# Altium PCB Digital Clock.PcbDoc (part 1 of 3)
Units mm, origin at the board's own origin, x right, y up, seen from the top; angles counter-clockwise.
Board outline 75 x 75 mm, 4 copper layers (Top Layer, GROUND, POWER, Bottom Layer), stack 1.369 mm thick; 74 components, 63 nets, 278 pads, 114 vias.
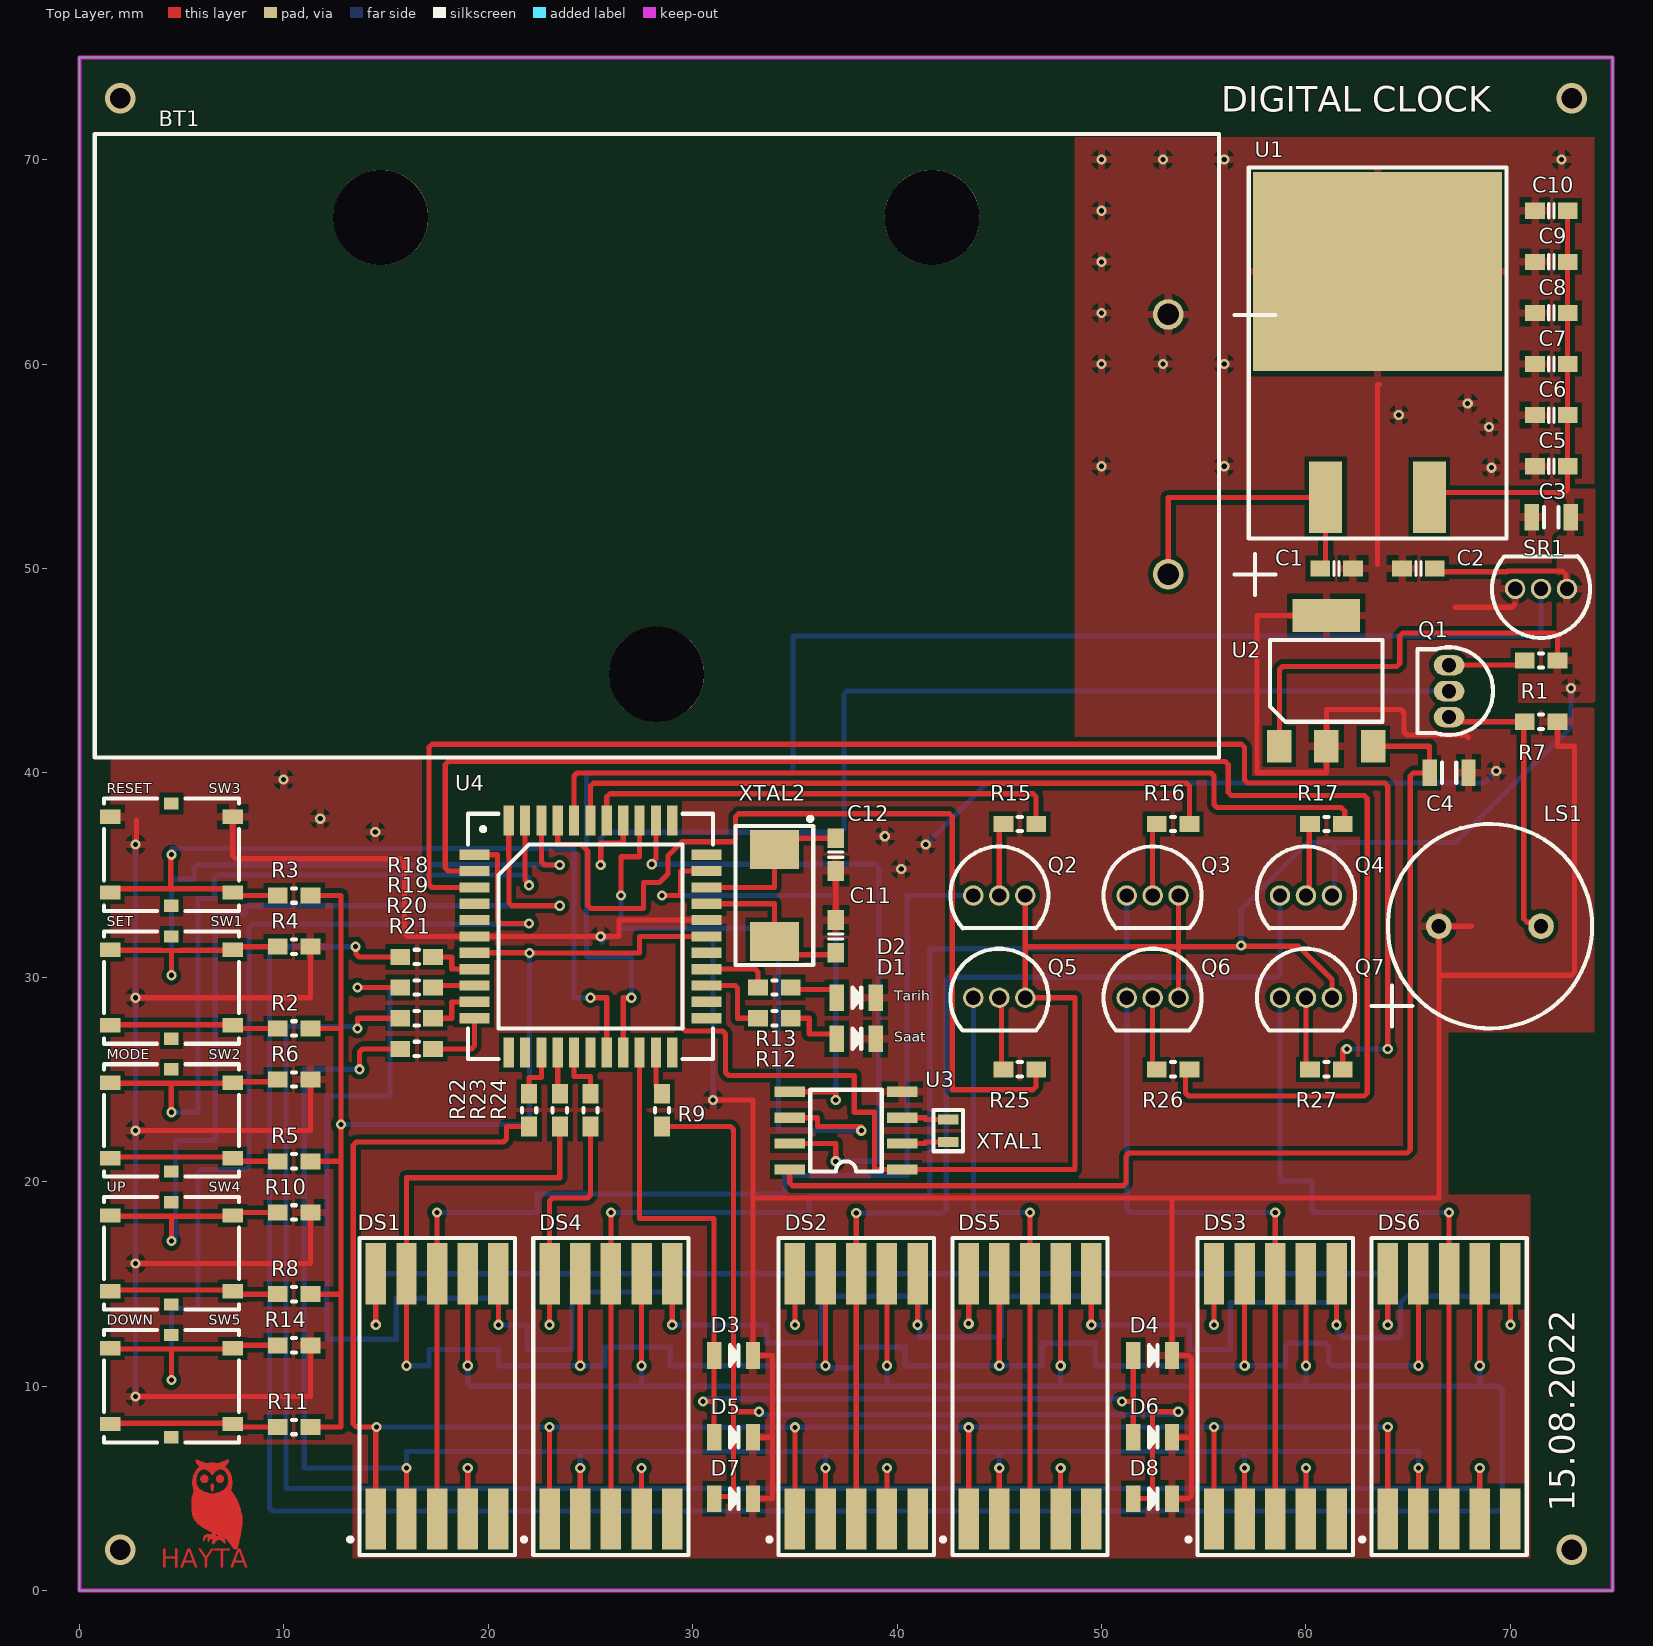
[diagram p0: Top Layer view]
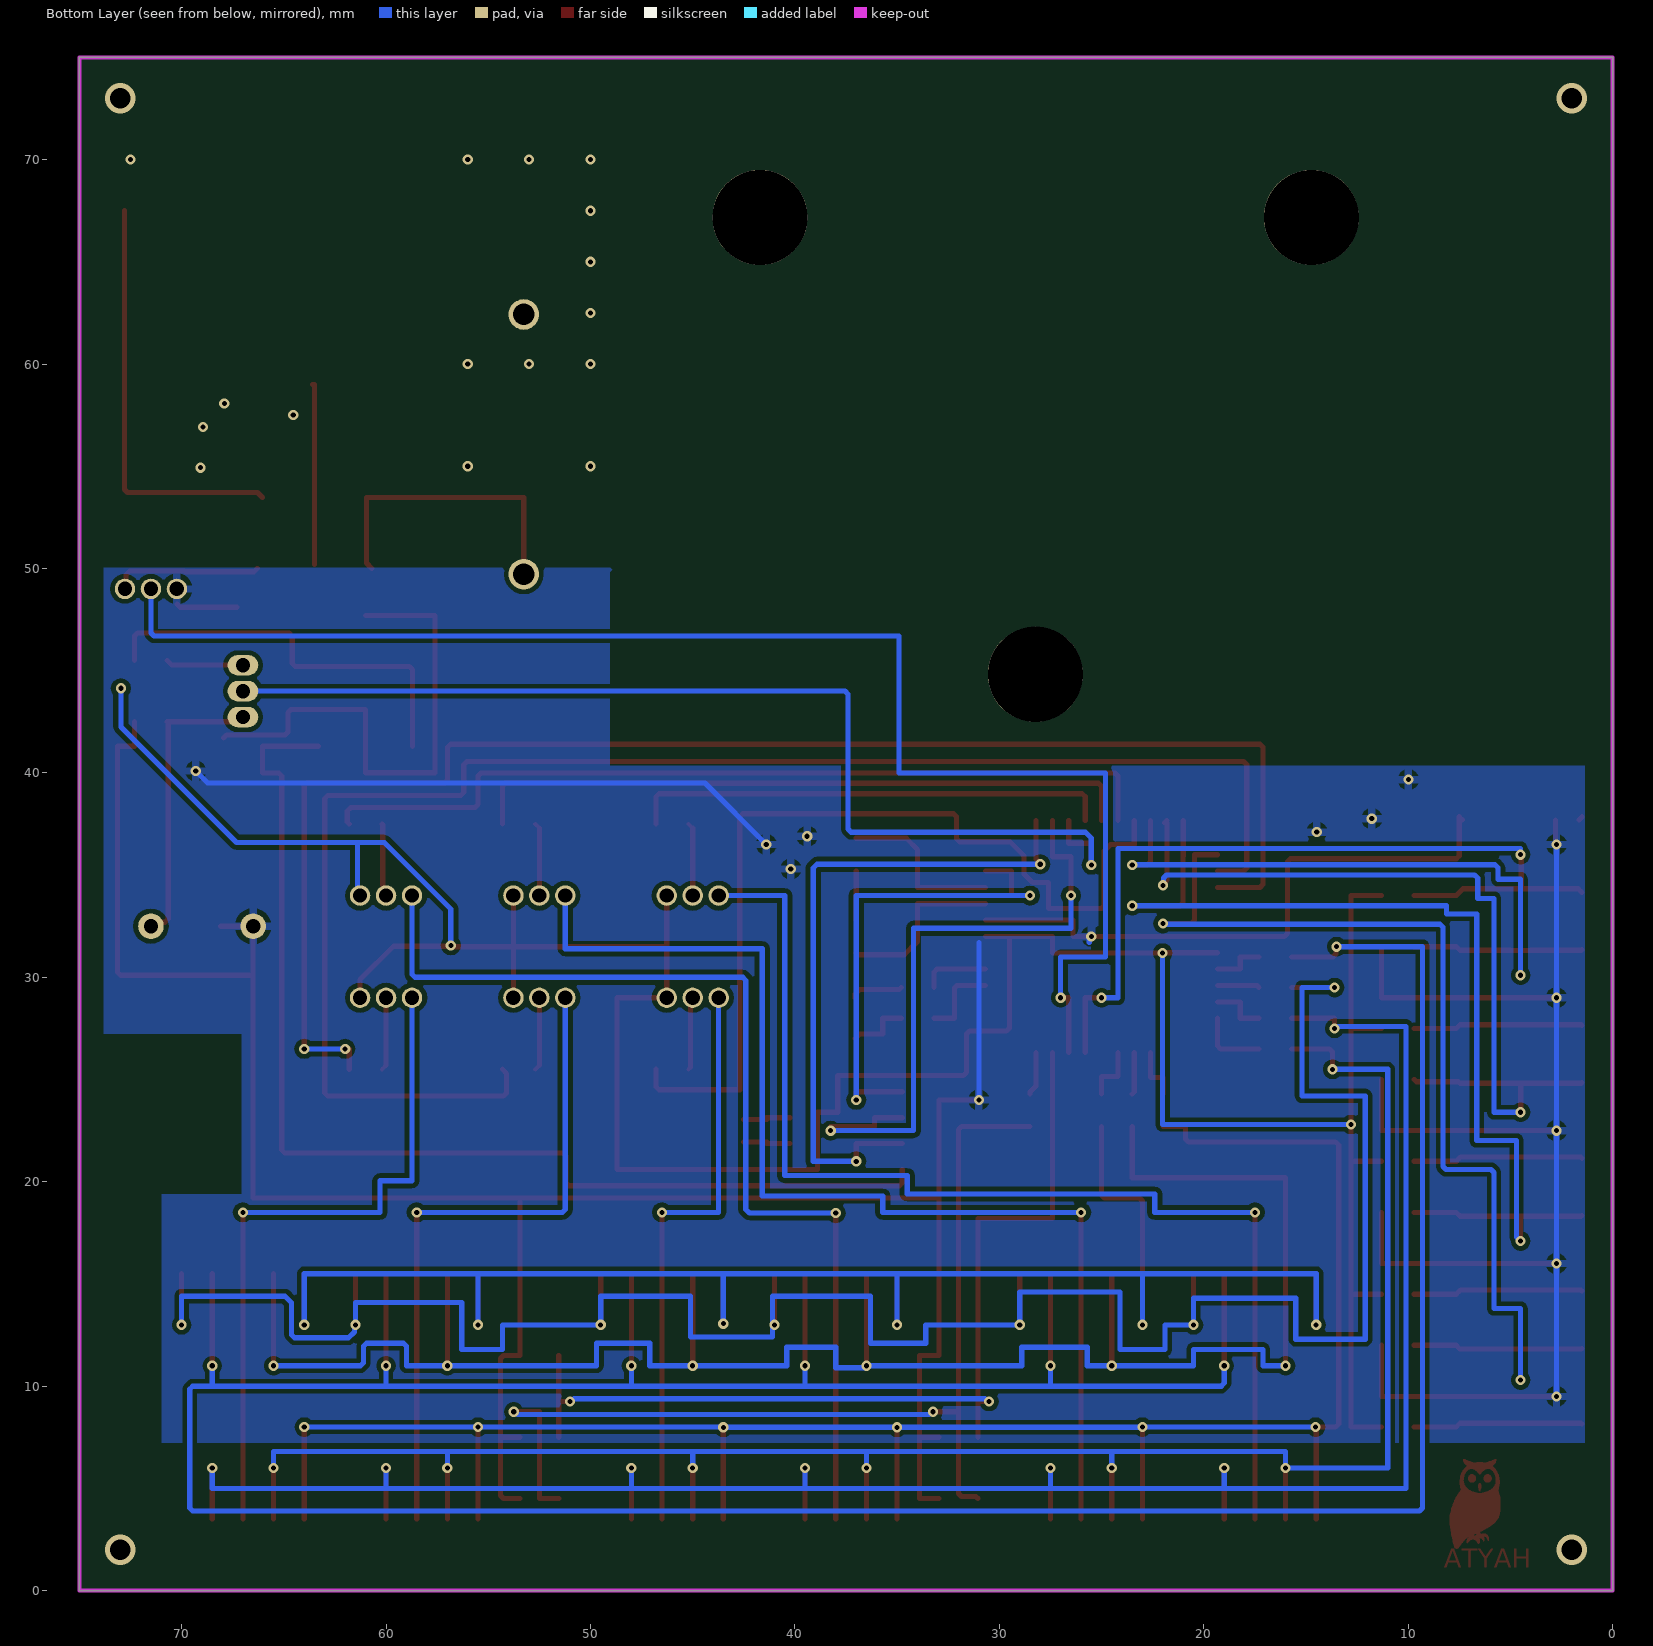
[diagram p1: Bottom Layer view, seen from below]
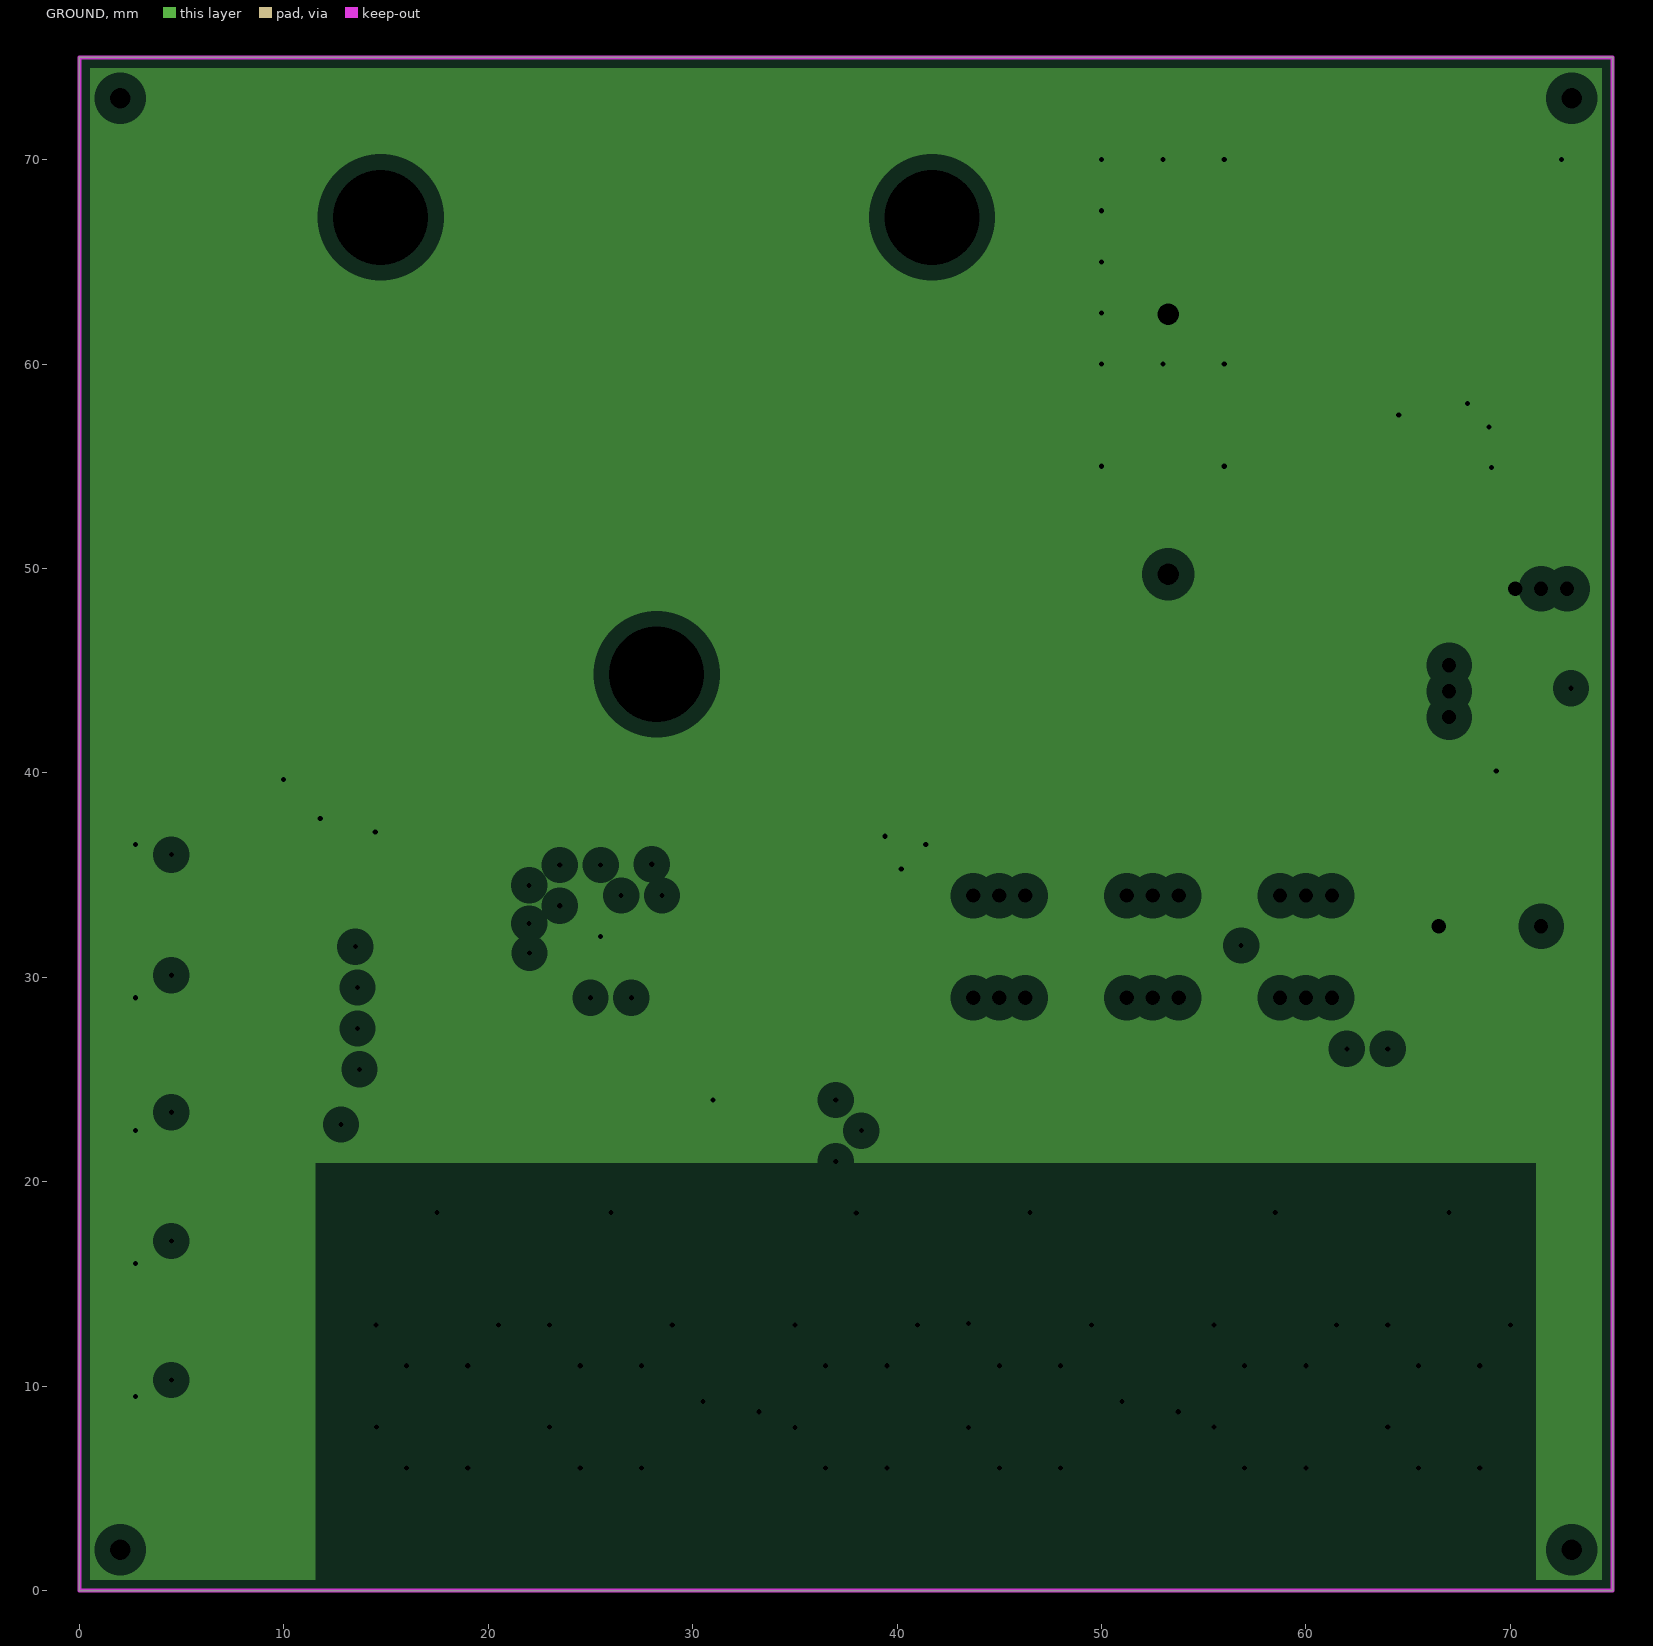
[diagram p2: GROUND, clearances drawn from the general rule]
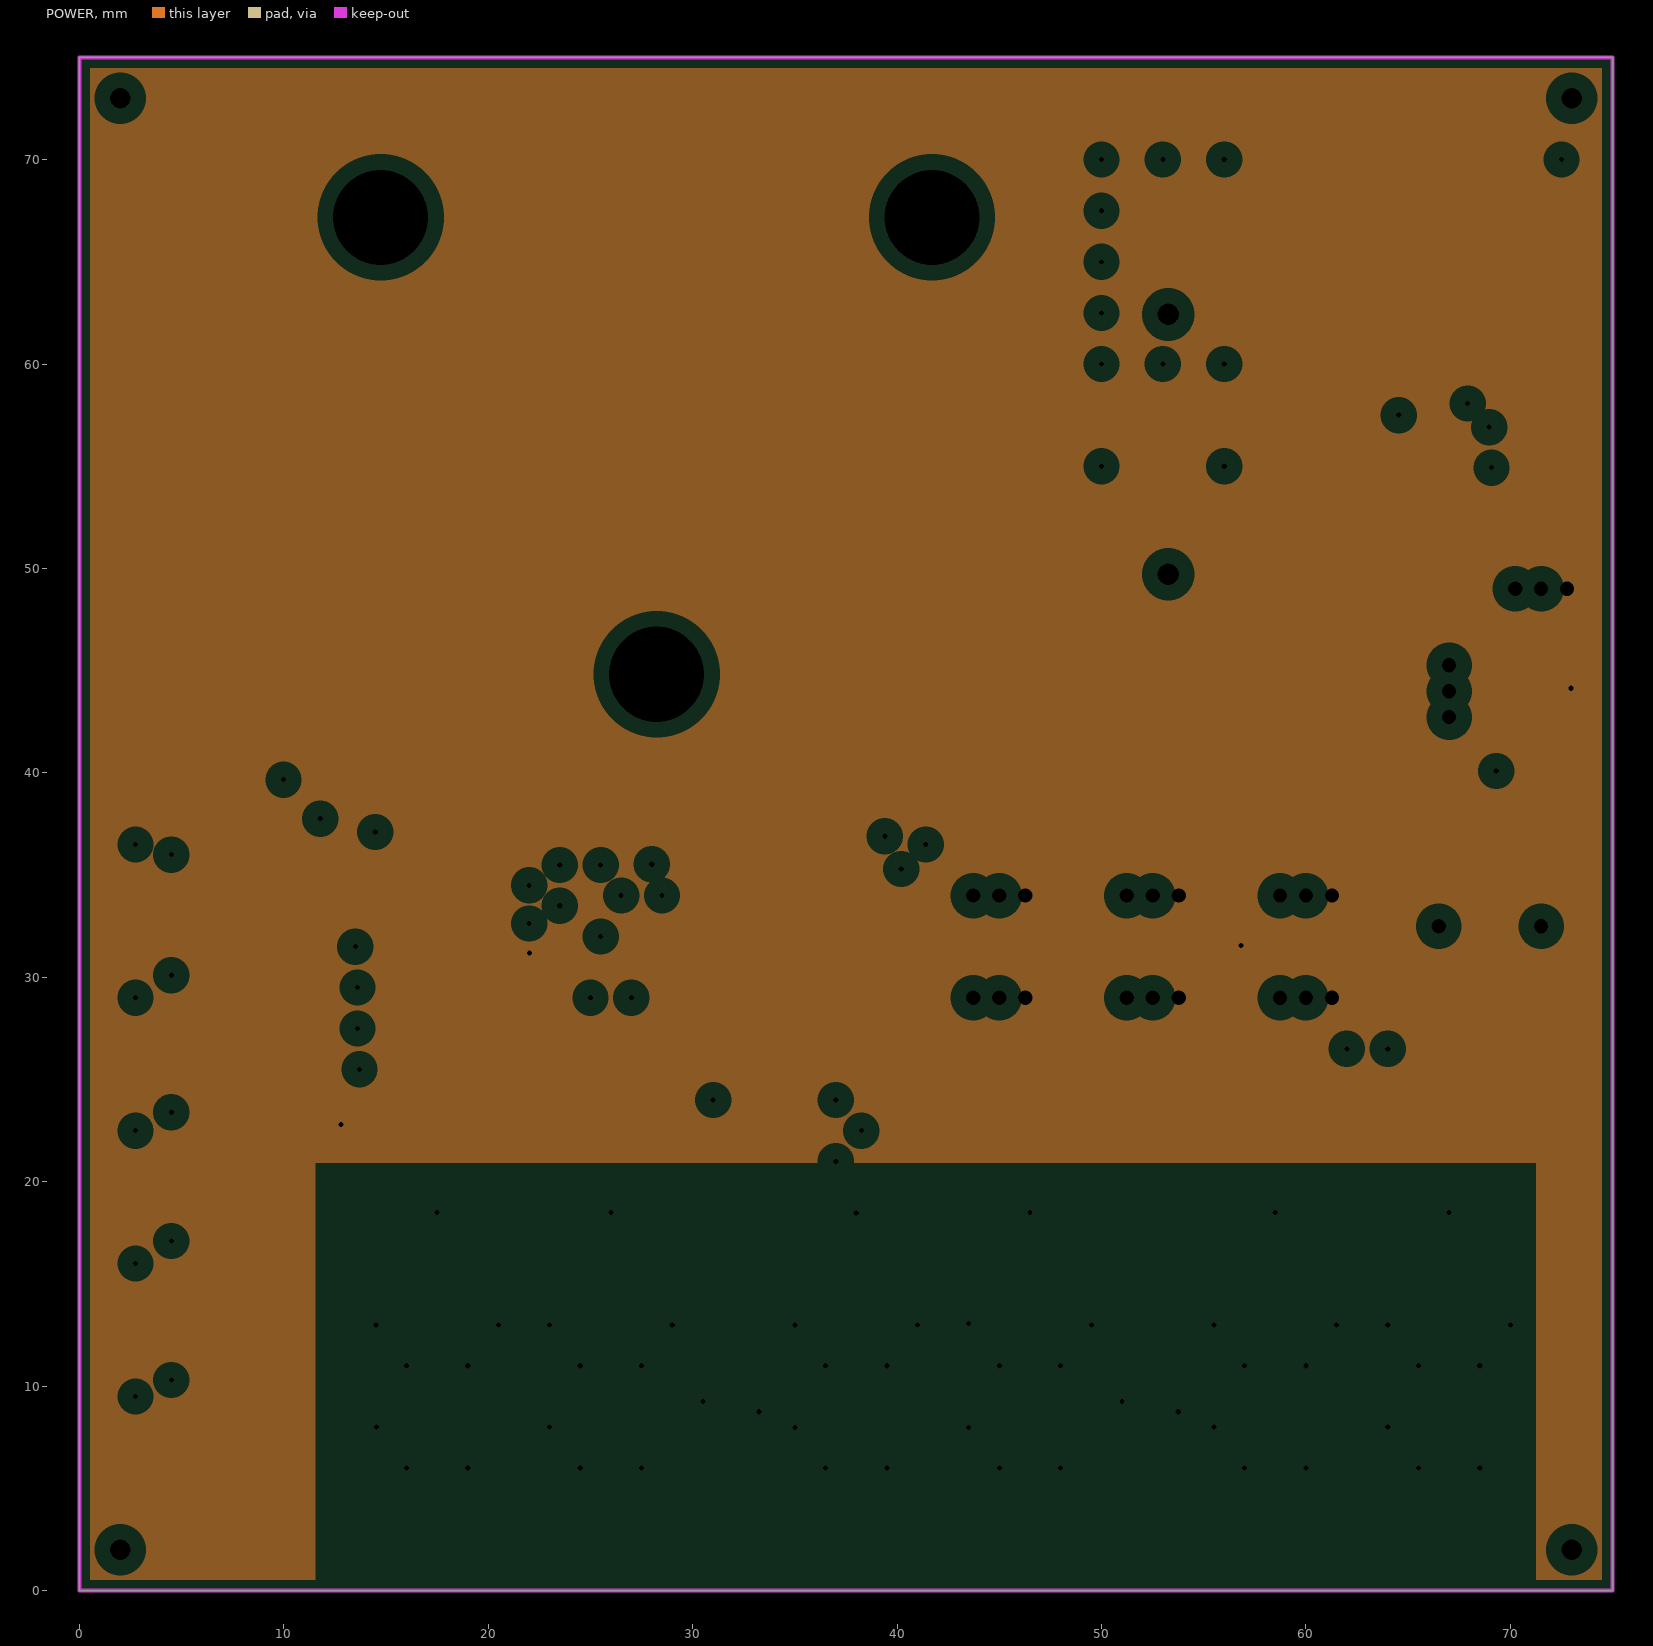
[diagram p3: POWER, clearances drawn from the general rule]
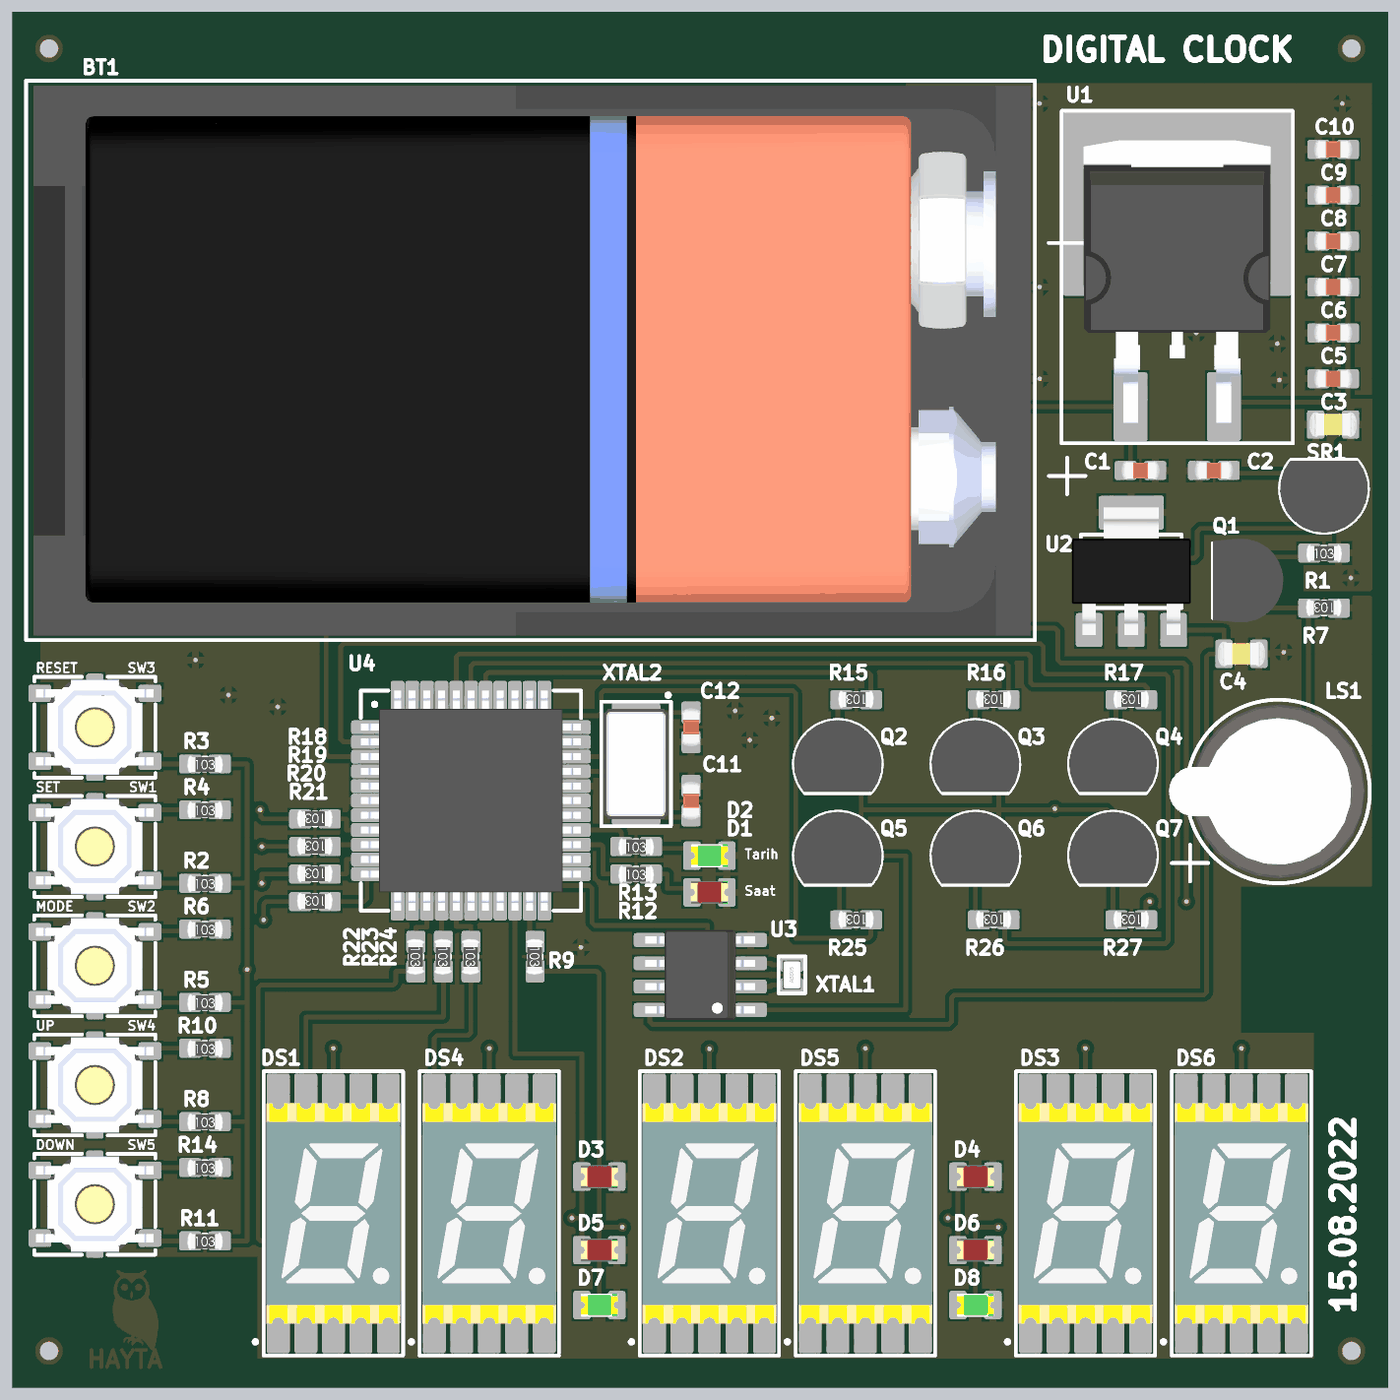
[diagram p5: 3D render of the assembled board from above, using the file's embedded part models]

## Layer stack, top to bottom
Top Solder: solder mask 0.0254, SM-001, Dk 4
Top Layer: signal copper 0.035
Dielectric 1: prepreg 0.1295, PP-017, Dk 4.3
Dielectric 2: prepreg 0.1295, PP-017, Dk 4.3
GROUND: plane copper 0.035, net GND
Dielectric 3: core 0.7112, Core-039, Dk 4.8
POWER: plane copper 0.035, net 5V
Dielectric 4: prepreg 0.1295, PP-017, Dk 4.3
Dielectric 5: prepreg 0.1295, PP-017, Dk 4.3
Bottom Layer: signal copper 0.035
Bottom Solder: solder mask 0.0254, SM-001, Dk 4

## Board outline
0,0 0,75 75,75 75,0

## Design rules (kind name [scope] priority, off if disabled: settings)
Clearance [All] p1: gap=0.229 ignorepadtopadclearanceinfootprint=TRUE except(0: Arc-Text Track-Text SMDPad-Text THPad-Text Via-Text Fill-Text Poly-Text Region-Text Text-Text Text-Hole; 0.203: SMDPad-SMDPad SMDPad-THPad THPad-THPad; 0.254: Arc-Arc Arc-Track Arc-SMDPad Arc-THPad Arc-Via Track-Track Track-SMDPad Track-THPad Track-Via SMDPad-Via THPad-Via Via-Via)
ComponentClearance [All] p1: gap=0.127 collisioncheckmode=3 verticalgap=0 showdistances=FALSE
HoleSize [All] p1: absolutevalues=TRUE maxlimit=5 minlimit=0.051 maxpercent=80.000 minpercent=20.000
MinimumSolderMaskSliver [All] p1: minsoldermaskwidth=0.05
NetAntennae [All] p1: netantennaetolerance=0.254
PasteMaskExpansion [All] p1: expansion=0.127
PlaneClearance [All] p1: clearance=0.762
PlaneConnect [All] p1: planeconnectstyle=Direct reliefexpansion=0.381 reliefentries=2 reliefconductorwidth=0.381 reliefairgap=0.254
PolygonConnect [All] p1: connectstyle=Relief reliefconductorwidth=0.381 reliefentries=4 polygonreliefangle="90 Angle" airgapwidth=0.254
RoutingCorners [All] p1: cornerstyle=45-Degree minsetback=1.905 maxsetback=1.905
RoutingVias [All] p1: holewidth=0.3 width=0.5 viastyle="Through Hole" minholewidth=0.25 minwidth=0.4 maxholewidth=0.5 maxwidth=1
SMDToCorner [All] p1: distance=10000
SilkToSilkClearance [All] p1: silktosilkclearance=0
SilkToSolderMaskClearance [IsPad] p1: minsilkscreentomaskgap=0 clearancetoexposedcopper=TRUE
SolderMaskExpansion [All] p1: expansion=0.01 istentingtop=FALSE
UnRoutedNet [All] p1: checkbadconnections=TRUE
Width [All] p1: maxlimit=2 minlimit=0.01 preferedwidth=0.5 bottomlayer_minwidth=0.203 bottomlayer_maxwidth=1.778 bottomlayer_prefwidth=0.381 minimp=50.000000 maximp=50.000000 favimp=50.000000
19 further rules are at their usual default settings.

## Components (designator, comment, footprint, x,y, rotation, side; value= is the part's Value field where it differs from the comment)
BT1 "BH9VPC & 6LF22XWA/B" BATTERY_9V 34,56 r0 top value=9V
C1 "GRM033R60J334ME90D" CAP_0603 61.5,50 r180 top
C2 "GRM033R60J104KE19D" CAP_0603 65.5,50 r0 top
C3 "CL21B105KBFNNNE" CAP_0805 72,52.5 r0 top
C4 "CL21A475KAQNNNE" CAP_0805 67,40 r180 top
C5 "GRM033R60J334ME90D" CAP_0603 72,55 r0 top
C6 "GRM033R60J104KE19D" CAP_0603 72,57.5 r0 top
C7 "C0603C104K5RACTU" CAP_0603 72,60 r0 top
C8 "C0603C104K5RACTU" CAP_0603 72,62.5 r0 top
C9 "C0603C104K5RACTU" CAP_0603 72,65 r0 top
C10 "C0603C104K5RACTU" CAP_0603 72,67.5 r0 top
C11 "GRM0335C1H220JA01D" CAP_0603 37,32 r270 top
C12 "GRM0335C1H220JA01D" CAP_0603 37,36 r90 top
D1 "LTST-C170KRKT" "LED RED_0805" 38,27 r0 top
D2 "LTST-C171GKT" "LED GREEN_0805" 38,29 r0 top
D3 "LTST-C170KRKT" "LED RED_0805" 32,11.5 r0 top
D4 "LTST-C170KRKT" "LED RED_0805" 52.5,11.5 r0 top
D5 "LTST-C170KRKT" "LED RED_0805" 32,7.5 r0 top
D6 "LTST-C170KRKT" "LED RED_0805" 52.5,7.5 r0 top
D7 "LTST-C171GKT" "LED GREEN_0805" 32,4.5 r0 top
D8 "LTST-C171GKT" "LED GREEN_0805" 52.5,4.5 r0 top
DS1 "ACSA03-41SURKWA-F01" "7 SEG_CA_SMD_ACSX03-41" 17.5,9.5 r0 top value=7SEG_A
DS2 "ACSA03-41SURKWA-F01" "7 SEG_CA_SMD_ACSX03-41" 38,9.5 r0 top value=7SEG_A
DS3 "ACSA03-41SURKWA-F01" "7 SEG_CA_SMD_ACSX03-41" 58.5,9.5 r0 top value=7SEG_A
DS4 "ACSA03-41SURKWA-F01" "7 SEG_CA_SMD_ACSX03-41" 26,9.5 r0 top value=7SEG_A
DS5 "ACSA03-41SURKWA-F01" "7 SEG_CA_SMD_ACSX03-41" 46.5,9.5 r0 top value=7SEG_A
DS6 "ACSA03-41SURKWA-F01" "7 SEG_CA_SMD_ACSX03-41" 67,9.5 r0 top value=7SEG_A
LS1 "AI-1027-TWT-5V-R" BUZZER_5V 69,32.5 r90 top value=BUZZER
Q1 "BC237G" TO-92 67,44 r270 top value=BC237
Q2 "BC557BTA" TO-92-3 45,34 r0 top value=BC557
Q3 "BC557BTA" TO-92-3 52.5,34 r0 top value=BC557
Q4 "BC557BTA" TO-92-3 60,34 r0 top value=BC557
Q5 "BC557BTA" TO-92-3 45,29 r0 top value=BC557
Q6 "BC557BTA" TO-92-3 52.5,29 r0 top value=BC557
Q7 "BC557BTA" TO-92-3 60,29 r0 top value=BC557
R1 "RC0603JR-07100RL" RES_0603 71.5,45.5 r0 top
R2 "RC0603JR-07100RL" RES_0603 10.5,27.5 r0 top
R3 "RC0603FR-0710KL" RES_0603 10.5,34 r0 top
R4 "RC0603FR-0710KL" RES_0603 10.5,31.5 r0 top
R5 "RC0603JR-07100RL" RES_0603 10.5,21 r0 top
R6 "RC0603FR-0710KL" RES_0603 10.5,25 r0 top
R7 "RC0603FR-0710KL" RES_0603 71.5,42.5 r180 top
R8 "RC0603JR-07100RL" RES_0603 10.5,14.5 r0 top
R9 "RC0603JR-07100RL" RES_0603 28.5,23.5 r270 top
R10 "RC0603FR-0710KL" RES_0603 10.5,18.5 r0 top
R11 "RC0603JR-07100RL" RES_0603 10.5,8 r0 top
R12 "RC0603JR-07100RL" RES_0603 34,28 r0 top
R13 "RC0603JR-07100RL" RES_0603 34,29.5 r0 top
R14 "RC0603FR-0710KL" RES_0603 10.5,12 r0 top
R15 "RC0603FR-071KL" RES_0603 46,37.5 r180 top
R16 "RC0603FR-071KL" RES_0603 53.5,37.5 r180 top
R17 "RC0603FR-071KL" RES_0603 61,37.5 r180 top
R18 "RC0603JR-07330RL" RES_0603 16.5,31 r180 top
R19 "RC0603JR-07330RL" RES_0603 16.5,29.5 r180 top
R20 "RC0603JR-07330RL" RES_0603 16.5,28 r180 top
R21 "RC0603JR-07330RL" RES_0603 16.5,26.5 r180 top
R22 "RC0603JR-07330RL" RES_0603 22,23.5 r270 top
R23 "RC0603JR-07330RL" RES_0603 23.5,23.5 r270 top
R24 "RC0603JR-07330RL" RES_0603 25,23.5 r270 top
R25 "RC0603FR-071KL" RES_0603 46,25.5 r180 top
R26 "RC0603FR-071KL" RES_0603 53.5,25.5 r180 top
R27 "RC0603FR-071KL" RES_0603 61,25.5 r180 top
SR1 "LM35DZ/NOPB" TO-92-3 71.5,49 r180 top value=LM35
SW1 "PTS526 SMG15 SMTR2 LFS" BUTTON_SMD_PTS526-SMG15 4.5,29.5 r0 top value=BUTTON
SW2 "PTS526 SMG15 SMTR2 LFS" BUTTON_SMD_PTS526-SMG15 4.5,23 r0 top value=BUTTON
SW3 "PTS526 SMG15 SMTR2 LFS" BUTTON_SMD_PTS526-SMG15 4.5,36 r0 top value=BUTTON
SW4 "PTS526 SMG15 SMTR2 LFS" BUTTON_SMD_PTS526-SMG15 4.5,16.5 r0 top value=BUTTON
SW5 "PTS526 SMG15 SMTR2 LFS" BUTTON_SMD_PTS526-SMG15 4.5,10 r0 top value=BUTTON
U1 "L7805ACD2T-TR" 7805_D2PAK_CD2T 63.5,59 r90 top value=7805
U2 "AP7361-33E-13" SOT-223 61,44.5 r0 top value=AP7361
U3 "DS1302Z+T&R" SOIC-8 37.5,22.5 r90 top value=DS1302
U4 "PIC16F877-20/PT" TQFP-44 25,32 r0 top value=PIC16F877/A
XTAL1 "ABS05-32.768KHZ-T" ABS05 42.5,22.5 r90 top
XTAL2 "ECS-200-20-23A-EN-TR" "CRYSTAL_2 SMD" 34,34 r270 top

## Footprints (in the part's own frame and the unit in brackets; to place one, negate y for a bottom-side part, rotate by r counter-clockwise, add the part's x,y. Pads: shape width x height; smd on the part's side, far side on the other; paste and mask are expansions set on the pad)
"7 SEG_CA_SMD_ACSX03-41" [mm]
  rect 1x3 smd mask+0.1: A(1.5,6) B(3,6) C(1.5,-6) D(-1.5,-6) DP(3,-6) E(-3,-6) F(-1.5,6) G(-3,6) VCC(0,-6) VCC(0,6)
  silkscreen extent -4.35,-7.75 3.8,7.75, body extent -3.65,-6 3.65,6, height 3.8
7805_D2PAK_CD2T [mm]
  rect 3.5x1.6 smd mask+0.1: 1(-5.525,2.54) 3(-5.525,-2.54)
  rect 9.75x12.2 smd mask+0.1: 2(5.525,0)
  silkscreen extent -7.52,-6.31 10.61,6.3, body extent -6.44,-5.1 8.99,5.1, height 4.6
ABS05 [mm]
  rect 0.5x1 smd: 1(-0.55,0) 2(0.55,0)
  silkscreen extent -1.01,-0.73 1.01,0.73, body extent -0.8,-0.5 0.8,0.5, height 0.5
BATTERY_9V [mm]
  round 1.5 hole 1.05 mask+0.1: 1(19.26,-6.275) 2(19.26,6.425)
  round 4.65 hole 4.65 mask+0.1: ""(-19.26,11.175) ""(-5.76,-11.175) ""(7.71,11.175)
  silkscreen extent -33.25,-15.25 24.5,15.25, body extent -32.85,-15 21.51,14.97, height 20.6
BUTTON_SMD_PTS526-SMG15 [mm]
  rect 1x0.7 smd: 1(-3,1.85) 1(3,1.85) 2(-3,-1.85) 2(3,-1.85)
  rect 0.7x0.6 smd: G(0,-2.5) G(0,2.5)
  silkscreen extent -3.3,-2.75 3.3,2.75, body extent -3.2,-2.6 3.2,2.6, height 1.7
BUZZER_5V [mm]
  round 1.25 hole 0.7: 1(0,2.5) 2(0,-2.5)
  silkscreen extent -5,-5 5,5.8, body extent -4.75,-4.75 4.75,5.95, height 5.05
CAP_0603 [mm]
  rect 0.965x0.787 smd: 1(-0.8,0) 2(0.8,0)
  silkscreen extent -0.13,-0.35 0.13,0.35, body extent -1.05,-0.51 1.05,0.51, height 0.8
CAP_0805 [mm]
  rect 0.7x1.3 smd: 1(-0.95,0) 2(0.95,0)
  silkscreen extent -0.35,-0.5 0.35,0.5, body extent -1.3,-0.68 1.3,0.68, height 0.9
"CRYSTAL_2 SMD" [mm]
  rect 1.9x2.4 smd mask+0.1: 1(-2.25,0) 2(2.25,0)
  silkscreen extent -3.85,-1.9 3.4,1.9, body extent -3,-1.75 3,1.75, height 1.1
"LED GREEN_0805" [mm]
  rect 0.7x1.3 smd mask+0.05: 1(-0.95,0) 2(0.95,0)
  silkscreen extent -0.18,-0.5 0.25,0.5, body extent -1.01,-0.63 1.01,0.62, height 1.1
"LED RED_0805" [mm]
  rect 0.7x1.3 smd mask+0.05: 1(-0.95,0) 2(0.95,0)
  silkscreen extent -0.18,-0.5 0.25,0.5, body extent -1.01,-0.63 1.01,0.62, height 1.1
RES_0603 [mm]
  rect 0.965x0.787 smd: 1(-0.8,0) 2(0.8,0)
  silkscreen extent -0.1,-0.35 0.1,0.35, body extent -0.98,-0.51 1,0.47, height 0.44
SOIC-8 [mm]
  rect 0.5x1.5 smd mask+0.05: 1(-1.905,-2.75) 2(-0.635,-2.75) 3(0.635,-2.75) 4(1.905,-2.75) 5(1.905,2.75) 6(0.635,2.75) 7(-0.635,2.75) 8(-1.905,2.75)
  silkscreen extent -2,-1.75 2,1.75, body extent -2.45,-3 2.45,3, height 1.75
SOT-223 [mm]
  rect 1.2x1.6 smd mask+0.05: 1(-2.3,-3.2) 2(0,-3.2) 3(2.3,-3.2)
  rect 3.3x1.6 smd mask+0.05: 2(0,3.2)
  silkscreen extent -2.75,-2 2.75,2, body extent -3.25,-3.48 3.25,3.48, height 1.65
TO-92 [mm]
  oval 1x1.5 hole 0.7 mask+0.1: 1(-1.27,0) 2(0,0) 3(1.27,0)
  silkscreen extent -2.15,-1.55 2.15,2.15, body extent -2.28,-1.55 2.28,2.29, height 5.19
TO-92-3 [mm]
  round 1 hole 0.7: 1(-1.27,0) 2(0,0) 3(1.27,0)
  silkscreen extent -2.4,-1.6 2.4,2.4, body extent -2.4,-1.53 2.4,2.4, height 5.74
TQFP-44 [mm]
  rect 1.47x0.5 smd: 1(-5.67,4) 2(-5.67,3.2) 3(-5.67,2.4) 4(-5.67,1.6) 5(-5.67,0.8) 6(-5.67,0) 7(-5.67,-0.8) 8(-5.67,-1.6) 9(-5.67,-2.4) 10(-5.67,-3.2) 11(-5.67,-4) 23(5.67,-4) 24(5.67,-3.2) 25(5.67,-2.4) 26(5.67,-1.6) 27(5.67,-0.8) 28(5.67,0) 29(5.67,0.8) 30(5.67,1.6) 31(5.67,2.4) 32(5.67,3.2) 33(5.67,4)
  rect 0.5x1.47 smd: 12(-4,-5.67) 13(-3.2,-5.67) 14(-2.4,-5.67) 15(-1.6,-5.67) 16(-0.8,-5.67) 17(0,-5.67) 18(0.8,-5.67) 19(1.6,-5.67) 20(2.4,-5.67) 21(3.2,-5.67) 22(4,-5.67) 34(4,5.67) 35(3.2,5.67) 36(2.4,5.67) 37(1.6,5.67) 38(0.8,5.67) 39(0,5.67) 40(-0.8,5.67) 41(-1.6,5.67) 42(-2.4,5.67) 43(-3.2,5.67) 44(-4,5.67)
  silkscreen extent -6,-6 6,6, body extent -6,-6 6,6, height 1.2

## Part data
BT1: library part BATTERY_9V, "Battery Holder (Open) 9V 1 Cell PC Pin &   9V Alkaline Manganese Dioxide 9 V Battery Non-Rechargeable (Primary)", Manufacturer="Memory Protection Devices", Manufacturer Part Number=BH9VPC, Max Operating Temperature=270°C, Min Operating Temperature=-40°C, Output Voltage=9V, Package Quantity=100, Supplier Part Number 1=BH9V-PC-ND, Category=Connectors, Chemistry/Technology=Alkaline, ComponentLink1Description=https://datasheet.ciiva.com/3/bh9vpc-datasheet-3862.pdf?src-supplier=Digi-Key, ComponentLink1URL=https://datasheet.ciiva.com/3/bh9vpc-datasheet-3862.pdf?src-supplier=Digi-Key, ComponentLink2Description=http://www.mouser.com/ds/2/315/panasonic_alkaline_batteries_9v_series_6lf22xwa-541606.pdf?src-supplier=Mouser, ComponentLink2URL=http://www.mouser.com/ds/2/315/panasonic_alkaline_batteries_9v_series_6lf22xwa-541606.pdf?src-supplier=Mouser, ComponentLink3Description=https://na.industrial.panasonic.com/sites/default/pidsa/files/downloads/files/panasonic-6lf22xwa-datasheet.pdf?src-supplier=Digi-Key, ComponentLink3URL=https://na.industrial.panasonic.com/sites/default/pidsa/files/downloads/files/panasonic-6lf22xwa-datasheet.pdf?src-supplier=Digi-Key, Height=0.69inch, Lead Free="Lead Free", Length=1.91inch, Mount="Surface Mount,PCB,Through Hole", Number of Cells=1, Packaging=Bulk, Pricing 1="1=2,27000, 10=1,91300, 50=1,68160, 100=1,58450, 250=1,45744, 500=1,36774, 1000=1,27805, 2500=1,15847, 5000=1,06131 (USD)", Pricing 2="1=1,98000, 20=1,64650, 210=1,35500, 420=1,26048, 630=1,18957, 1050=1,11868, 2520=1,04777 (USD)", RoHS=Yes, Stock 1=5860, Stock 2=21288, Supplier 1=Digi-Key, Supplier 2=Digi-Key, Supplier Part Number 2=P687-ND, Termination=SMD/SMT, Voltage Rating=9V, Weight=45.59g, Width=0.51inch
C1 C5: library part "0603_CAP_CER  UF_0.33", "CAP CER 0.33UF %20 0603 SMD", Capacitance=330nF, Capacitor=0.33UF, Case Code (Metric)=0603, Case Code (Imperial)=0201, Dielectric=X5R, Manufacturer=Murata, Max Operating Temperature=85°C, Min Operating Temperature=-55°C, Package Quantity=15000, Supplier Part Number 1=490-10408-1-ND, Tolerance=20%, Voltage Rating=6.3V, Case/Package=0201, Category="Ceramic Capacitors", ComponentLink1Description=http://www.farnell.com/datasheets/2722735.pdf?src-supplier=Farnell, ComponentLink1URL=http://www.farnell.com/datasheets/2722735.pdf?src-supplier=Farnell, ComponentLink2Description=http://www.mouser.com/ds/2/281/c02e-2905.pdf?src-supplier=Mouser, ComponentLink2URL=http://www.mouser.com/ds/2/281/c02e-2905.pdf?src-supplier=Mouser, ComponentLink3Description=http://search.murata.co.jp/Ceramy/image/img/A01X/G101/ENG/GRM033R60J334ME90-01.pdf?src-supplier=Digi-Key, ComponentLink3URL=http://search.murata.co.jp/Ceramy/image/img/A01X/G101/ENG/GRM033R60J334ME90-01.pdf?src-supplier=Digi-Key, ComponentLink4Description=http://www.farnell.com/datasheets/2722735.pdf?src-supplier=Newark, ComponentLink4URL=http://www.farnell.com/datasheets/2722735.pdf?src-supplier=Newark, Height=0.3mm, Length=0.024inch, Manufacturer Part Number=GRM033R60J334ME90D, Mount="Surface Mount", Packaging="Tape and Reel", Pricing 1="1=0,12000, 10=0,08400, 50=0,04740, 100=0,03930, 500=0,02754, 1000=0,02280, 2500=0,02122, 5000=0,01941 (USD)", RoHS=Yes, RoHS Compliant=Yes, Stock 1=1061917, Supplier 1=Digi-Key, Termination=SMD/SMT, Thickness=0.013inch, Voltage Rating (DC)=6.3V, Weight=1.2E-05oz, Width=0.012inch
C2 C6: library part "0603_CAP_CER  UF_0.1", "CAP CER 0.1UF %10 0603 SMD", Capacitance=100nF, Capacitor=0.1UF, Case Code (Metric)=0603, Case Code (Imperial)=0201, Dielectric=X5R, Manufacturer=Murata, Max Operating Temperature=85°C, Min Operating Temperature=-55°C, Package Quantity=1, Supplier Part Number 1=490-3167-1-ND, Tolerance=10%, Voltage=6.3V, Case/Package=0201, Category="Ceramic Capacitors", ComponentLink1Description=https://datasheet.ciiva.com/6072/1747434-6072404.pdf?src-supplier=Farnell, ComponentLink1URL=https://datasheet.ciiva.com/6072/1747434-6072404.pdf?src-supplier=Farnell, ComponentLink2Description=https://datasheet.ciiva.com/131/grm033r60j104ke19x-131060.pdf?src-supplier=Digi-Key, ComponentLink2URL=https://datasheet.ciiva.com/131/grm033r60j104ke19x-131060.pdf?src-supplier=Digi-Key, ComponentLink3Description=https://datasheet.ciiva.com/5420/product-5420533.pdf?src-supplier=Mouser, ComponentLink3URL=https://datasheet.ciiva.com/5420/product-5420533.pdf?src-supplier=Mouser, ComponentLink4Description=https://datasheet.ciiva.com/18101/getdatasheetpartid-56050-18101730.pdf?src-supplier=Verical, ComponentLink4URL=https://datasheet.ciiva.com/18101/getdatasheetpartid-56050-18101730.pdf?src-supplier=Verical, ComponentLink5Description=https://datasheet.ciiva.com/29199/455624-da-01-en-vs-kondensator-0201-29199254.pdf?src-supplier=Conrad, ComponentLink5URL=https://datasheet.ciiva.com/29199/455624-da-01-en-vs-kondensator-0201-29199254.pdf?src-supplier=Conrad, ComponentLink6Description=https://datasheet.ciiva.com/7718/1747434-7718974.pdf?src-supplier=Element14, ComponentLink6URL=https://datasheet.ciiva.com/7718/1747434-7718974.pdf?src-supplier=Element14, ComponentLink7Description=https://datasheet.ciiva.com/7718/1747434-7718973.pdf?src-supplier=Element14, ComponentLink7URL=https://datasheet.ciiva.com/7718/1747434-7718973.pdf?src-supplier=Element14, ComponentLink8Description=https://datasheet.ciiva.com/131/grm033r60j104ke19-01-131062.pdf?src-supplier=Digi-Key, ComponentLink8URL=https://datasheet.ciiva.com/131/grm033r60j104ke19-01-131062.pdf?src-supplier=Digi-Key, ComponentLink9Description=https://datasheet.ciiva.com/24157/product-24157402.pdf?src-supplier=Future+Electronics, ComponentLink9URL=https://datasheet.ciiva.com/24157/product-24157402.pdf?src-supplier=Future+Electronics, Depth=0.3mm, Height=0.3mm, Lead Free="Lead Free", Length=0.6mm, Manufacturer Part Number=GRM033R60J104KE19D, Material=Ceramic, Mount="Surface Mount", Packaging="Tape and Reel", Pricing 1="1=0,10000, 10=0,01900, 50=0,01060, 100=0,00860, 500=0,00614, 1000=0,00482, 2500=0,00438, 5000=0,00403 (USD)", Radiation Hardening=No, REACH SVHC="No SVHC", RoHS=Yes, RoHS Compliant=Yes, Stock 1=25268944, Supplier 1=Digi-Key, Termination=SMD/SMT, Thickness=0.013inch, Voltage Rating=6.3V, Voltage Rating (DC)=6.3V, Weight=6E-06oz, Width=0.012inch
C3: library part "0805_CAP_CER  UF_1", "CAP CER 1UF %10 0805 SMD", Capacitor=1UF
C4: library part "0805_CAP_CER  UF_4.7", "CAP CER 4.7UF %10 0805 SMD", Capacitor=4.7UF
C7 C8 C9 C10: library part "0603_CAP_CER  NF_100", "CAP CER 100NF %10 0603 SMD", Capacitor=100NF
C11 C12: library part "0603_CAP_CER  PF_22", "CAP CER 22PF %5 0603 SMD", Capacitance=22pF, Capacitor=22PF, Case Code (Metric)=0603, Case Code (Imperial)=0201, Dielectric=C0G, Manufacturer=Murata, Max Operating Temperature=125°C, Min Operating Temperature=-55°C, Package Quantity=15000, Supplier Part Number 1=490-6123-1-ND, Tolerance=5%, Voltage=50V, Case/Package=0201, Category="Ceramic Capacitors", ComponentLink1Description=https://datasheet.ciiva.com/6271/partnumbering-e-01-6271146.pdf?src-supplier=Digi-Key, ComponentLink1URL=https://datasheet.ciiva.com/6271/partnumbering-e-01-6271146.pdf?src-supplier=Digi-Key, ComponentLink2Description=https://datasheet.ciiva.com/6271/partnumbering-e-01-6271143.pdf?src-supplier=Digi-Key, ComponentLink2URL=https://datasheet.ciiva.com/6271/partnumbering-e-01-6271143.pdf?src-supplier=Digi-Key, ComponentLink3Description=https://datasheet.ciiva.com/6271/partnumbering-e-01-6271149.pdf?src-supplier=Digi-Key, ComponentLink3URL=https://datasheet.ciiva.com/6271/partnumbering-e-01-6271149.pdf?src-supplier=Digi-Key, Depth=0.3mm, Height=0.3mm, Lead Free="Lead Free", Length=0.6mm, Manufacturer Part Number=GRM0335C1H220JA01D, Mount="Surface Mount", Packaging="Tape and Reel", Pricing 1="1=0,10000, 10=0,01400, 50=0,00760, 100=0,00620, 500=0,00440, 1000=0,00346, 2500=0,00315, 5000=0,00290 (USD)", RoHS=Yes, RoHS Compliant=Yes, Series=GRM, Stock 1=1262569, Supplier 1=Digi-Key, Termination=SMD/SMT, Thickness=0.013inch, Voltage Rating=50V, Voltage Rating (DC)=50V, Width=0.012inch
D1 D3 D4 D5 D6: library part LED_0805_RED, "Red 631nm LED Indication - Discrete 2V 0805 (2012 Metric)", Case Code (Metric)=2012, Case Code (Imperial)=0805, Color=Red, Forward Current=30mA, Forward Voltage=2V, Lens Color=Colorless, Manufacturer="Vishay Lite-On", Max Operating Temperature=85°C, Min Operating Temperature=-55°C, Package Quantity=1, Power Dissipation=75mW, Reverse Voltage=5V, Supplier Part Number 1=160-1415-1-ND, Test Current=20mA, Case/Package=0805, Category=LEDs, ComponentLink1Description=https://datasheet.ciiva.com/11775/0900766b80dc027b-11775642.pdf?src-supplier=RSComponents, ComponentLink1URL=https://datasheet.ciiva.com/11775/0900766b80dc027b-11775642.pdf?src-supplier=RSComponents, ComponentLink2Description=https://datasheet.ciiva.com/12403/lite-on-ltst-c170krkt-187374-12403917.pdf?src-supplier=Mouser, ComponentLink2URL=https://datasheet.ciiva.com/12403/lite-on-ltst-c170krkt-187374-12403917.pdf?src-supplier=Mouser, ComponentLink3Description=https://datasheet.ciiva.com/16362/lite-on20ltst-c170krkt-16362852.pdf?src-supplier=Future+Electronics, ComponentLink3URL=https://datasheet.ciiva.com/16362/lite-on20ltst-c170krkt-16362852.pdf?src-supplier=Future+Electronics, ComponentLink4Description=https://datasheet.ciiva.com/15117/getdatasheetpartid-103842-15117442.pdf?src-supplier=Verical, ComponentLink4URL=https://datasheet.ciiva.com/15117/getdatasheetpartid-103842-15117442.pdf?src-supplier=Verical, ComponentLink5Description=https://datasheet.ciiva.com/2110/s-110-ltst-c170krkt-2110037.pdf?src-supplier=Digi-Key, ComponentLink5URL=https://datasheet.ciiva.com/2110/s-110-ltst-c170krkt-2110037.pdf?src-supplier=Digi-Key, ComponentLink6Description=https://datasheet.ciiva.com/2110/s-110-ltst-c170krkt-2110036.pdf?src-supplier=Digi-Key, ComponentLink6URL=https://datasheet.ciiva.com/2110/s-110-ltst-c170krkt-2110036.pdf?src-supplier=Digi-Key, ComponentLink7Description=https://datasheet.ciiva.com/2110/s-110-ltst-c170krkt-2110038.pdf?src-supplier=Digi-Key, ComponentLink7URL=https://datasheet.ciiva.com/2110/s-110-ltst-c170krkt-2110038.pdf?src-supplier=Digi-Key, Depth=1.6mm, Diode=RED, Dominant Wavelength=631nm, Height=1.1mm, Lead Free="Lead Free", Length=3.2mm, Lens Style=Clear,Diffused,Colorless,Rectangular, Lens Transparency=Clear, Luminous Intensity=54mcd, Manufacturer Part Number=LTST-C170KRKT, Mount="Surface Mount", Number of Elements=1, Number of LEDs=1, Number of Pins=2, Packaging="Tape and Reel", Power Rating=75mW, Pricing 1="1=0,31000, 10=0,16900, 100=0,07860, 500=0,07260, 1000=0,05687 (USD)", Radiation Hardening=No, RoHS=Yes, RoHS Compliant=Yes, Series="CHIPLED 0805", Stock 1=699495, Supplier 1=Digi-Key, Viewing Angle=130°, Wavelength=639nm, Width=1.25mm, Illumination Color=Red
D2 D7 D8: library part LED_0805_GREEN, "Green 569nm LED Indication - Discrete 2.1V 0805 (2012 Metric)", Case Code (Metric)=2012, Case Code (Imperial)=0805, Color=Green, Forward Current=30mA, Forward Voltage=2.1V, Lens Color=Colorless, Manufacturer="Vishay Lite-On", Max Operating Temperature=85°C, Min Operating Temperature=-55°C, Package Quantity=1, Power Dissipation=100mW, Reverse Voltage=5V, Supplier Part Number 1=160-1423-1-ND, Test Current=10mA, Case/Package=0805, Category=LEDs, ComponentLink1Description=https://datasheet.ciiva.com/2110/ltst-c171gkt-2110000.pdf?src-supplier=Digi-Key, ComponentLink1URL=https://datasheet.ciiva.com/2110/ltst-c171gkt-2110000.pdf?src-supplier=Digi-Key, ComponentLink2Description=https://datasheet.ciiva.com/11773/0900766b80dc0296-11773991.pdf?src-supplier=RSComponents, ComponentLink2URL=https://datasheet.ciiva.com/11773/0900766b80dc0296-11773991.pdf?src-supplier=RSComponents, ComponentLink3Description=https://datasheet.ciiva.com/12400/lite-on-ltst-c171gkt-190133-12400647.pdf?src-supplier=Mouser, ComponentLink3URL=https://datasheet.ciiva.com/12400/lite-on-ltst-c171gkt-190133-12400647.pdf?src-supplier=Mouser, ComponentLink4Description=https://datasheet.ciiva.com/2110/ltst-c171gkt-2110001.pdf?src-supplier=Digi-Key, ComponentLink4URL=https://datasheet.ciiva.com/2110/ltst-c171gkt-2110001.pdf?src-supplier=Digi-Key, ComponentLink5Description=https://datasheet.ciiva.com/2110/ltst-c171gkt-2110002.pdf?src-supplier=Digi-Key, ComponentLink5URL=https://datasheet.ciiva.com/2110/ltst-c171gkt-2110002.pdf?src-supplier=Digi-Key, ComponentLink6Description=https://datasheet.ciiva.com/16396/ltst-c171gkt-16396549.pdf?src-supplier=Future+Electronics, ComponentLink6URL=https://datasheet.ciiva.com/16396/ltst-c171gkt-16396549.pdf?src-supplier=Future+Electronics, Depth=1.25mm, Diode=GREEN, Dominant Wavelength=569nm, Height=0.8mm, Lead Free="Lead Free", Length=2mm, Lens Style=Diffused,Colorless,Rectangular,Clear, Lens Transparency=Clear, Luminous Intensity=12mcd, Manufacturer Part Number=LTST-C171GKT, Mount="Surface Mount", Number of Elements=1, Number of LEDs=1, Number of Pins=2, Packaging="Tape and Reel", Power Rating=100mW, Pricing 1="1=0,26000, 10=0,14100, 100=0,06560, 500=0,06060, 1000=0,04747 (USD)", Radiation Hardening=No, RoHS=Yes, RoHS Compliant=Yes, Series="CHIPLED 0805", Stock 1=470042, Supplier 1=Digi-Key, Viewing Angle=130°, Wavelength=585nm, Width=1.25mm, Illumination Color=Green
DS1 DS2 DS3 DS4 DS5 DS6: library part "7 SEG DISP_CA_SMD", "Display Modules - LED Character and Numeric Red 7-Segment 1 Character Common Anode 1.95V 20mA 0.394\" H x 0.287\" W x 0.148\" D (10.00mm x 7.30mm x 3.75mm) 10-SMD, No Lead", Case/Package=SMD/SMT, Color=Red, Forward Current=20mA, Forward Voltage=1.95V, Manufacturer=Kingbright, Max Operating Temperature=85°C, Max Power Dissipation=75mW, Min Operating Temperature=-40°C, Package Quantity=550, Supplier Part Number 1=754-2231-1-ND, Category=LEDs, ComponentLink1Description=https://datasheet.ciiva.com/2104/acsa03-41surkwa-f01-2104880.pdf?src-supplier=Digi-Key, ComponentLink1URL=https://datasheet.ciiva.com/2104/acsa03-41surkwa-f01-2104880.pdf?src-supplier=Digi-Key, ComponentLink2Description=https://datasheet.ciiva.com/16411/acsa03-41surkwa-f01-16411419.pdf?src-supplier=Future+Electronics, ComponentLink2URL=https://datasheet.ciiva.com/16411/acsa03-41surkwa-f01-16411419.pdf?src-supplier=Future+Electronics, Display Type=Segment, Element Configuration="Common Anode", Height=0.394inch, Lead Free="Lead Free", Luminous Intensity=27mcd, Manufacturer Part Number=ACSA03-41SURKWA-F01, Number of Characters=1, Operating Supply Voltage=1.95V, Packaging="Tape and Reel", Power Consumption=75mW, Pricing 1="1=3,21000, 10=2,27100, 100=1,86020 (USD)", RoHS=Yes, RoHS Compliant=Yes, Stock 1=70, Supplier 1=Digi-Key, Test Current=20mA, Wavelength=630nm, Width=0.287inch, Illumination Color=Red
LS1: library part BUZZER_5V, "Buzzers Indicator, Internally Driven Electromechanical/Magnetic 5 V 30mA 2.7kHz 80dB @ 5V, 10cm Through Hole PC Pins", Current Rating=30mA, Frequency=2.7kHz, Manufacturer="Projects Unlimited", Max Operating Temperature=80°C, Max Supply Voltage (DC)=8V, Min Operating Temperature=-20°C, Min Supply Voltage (DC)=3V, Nominal Supply Voltage (DC)=5V, Package Quantity=150, Supplier Part Number 1=668-1339-ND, Category="Audio Products", ComponentLink1Description=https://datasheet.ciiva.com/4623/ai-1027-twt-5v-r-70359-4623188.pdf?src-supplier=Mouser, ComponentLink1URL=https://datasheet.ciiva.com/4623/ai-1027-twt-5v-r-70359-4623188.pdf?src-supplier=Mouser, ComponentLink2Description=https://datasheet.ciiva.com/8113/ai-1027-twt-5v-r-8113492.pdf?src-supplier=Avnet, ComponentLink2URL=https://datasheet.ciiva.com/8113/ai-1027-twt-5v-r-8113492.pdf?src-supplier=Avnet, ComponentLink3Description=https://datasheet.ciiva.com/6560/ai-1027-twt-5v-r-6560933.pdf?src-supplier=Digi-Key, ComponentLink3URL=https://datasheet.ciiva.com/6560/ai-1027-twt-5v-r-6560933.pdf?src-supplier=Digi-Key, Contact Plating=Tin, Diameter=9.5mm, Height=5mm, Length=9.5mm, Manufacturer Part Number=AI-1027-TWT-5V-R, Max Supply Current=30mA, Mount="Through Hole", Operating Supply Current=30mA, Packaging=Tray, Pricing 1="1=2,12000, 10=1,75800, 25=1,62480, 40=1,52800, 150=1,43453, 450=1,23138, 1050=1,17541 (USD)", RoHS=Yes, Sensing Method=Magnetic, Stock 1=105769, Supplier 1=Digi-Key, Termination="PC Pins", Voltage Rating (DC)=5V, Washable=Yes, Width=9.5mm
Q1: library part BC237, "Bipolar (BJT) Transistor NPN 45 V 100 mA 200MHz 350 mW Through Hole TO-92 (TO-226)", Case/Package=TO-92-3, Collector Base Voltage (VCBO)=50V, Collector Emitter Breakdown Voltage=45V, Collector Emitter Saturation Voltage=200mV, Collector Emitter Voltage (VCEO)=600mV, Continuous Collector Current=100mA, Emitter Base Voltage (VEBO)=6V, Manufacturer="ON Semiconductor", Max Operating Temperature=150°C, Max Power Dissipation=350mW, Min Operating Temperature=-55°C, Package Quantity=5000, Supplier Part Number 1=BC237G-ND, Transition Frequency=200MHz, Category=BJTs, Collector-emitter Voltage-Max=600mV, ComponentLink1Description=https://datasheet.ciiva.com/985/bc237b-c-239c-985935.pdf?src-supplier=Digi-Key, ComponentLink1URL=https://datasheet.ciiva.com/985/bc237b-c-239c-985935.pdf?src-supplier=Digi-Key, Current Rating=100mA, Element Configuration=Single, Gain Bandwidth Product=200MHz, hFE Min=120, Lead Free="Lead Free", Manufacturer Part Number=BC237G, Max Collector Current=100mA, Mount="Through Hole", Packaging=Bulk, Polarity=NPN, RoHS=Yes, RoHS Compliant=Yes, Series=-, Supplier 1=Digi-Key, Voltage Rating (DC)=45V
Q2 Q3 Q4 Q5 Q6 Q7: library part BC557, "Trans GP BJT PNP 45V 0.1A 500mW 3-Pin TO-92 Fan-Fold", Case/Package=TO-92, Collector Base Voltage (VCBO)=-50V, Collector Emitter Breakdown Voltage=45V, Collector Emitter Saturation Voltage=-250mV, Collector-emitter Voltage-Max=650mV, Current Rating=-100mA, Emitter Base Voltage (VEBO)=-5V, Frequency=150MHz, Manufacturer="ON Semiconductor / Fairchild", Max Collector Current=100mA, Max Operating Temperature=150°C, Max Power Dissipation=500mW, Min Operating Temperature=-65°C, Package Quantity=1, Supplier Part Number 1=BC557BTACT-ND, Voltage Rating (DC)=-45V, Category=BJTs, Collector Emitter Voltage (VCEO)=45V, ComponentLink1Description=https://datasheet.ciiva.com/25625/0900766b810e1cf8-25625979.pdf?src-supplier=RSComponents, ComponentLink1URL=https://datasheet.ciiva.com/25625/0900766b810e1cf8-25625979.pdf?src-supplier=RSComponents, ComponentLink2Description=https://datasheet.ciiva.com/4722/bc557-193968-4722128.pdf?src-supplier=Mouser, ComponentLink2URL=https://datasheet.ciiva.com/4722/bc557-193968-4722128.pdf?src-supplier=Mouser, ComponentLink3Description=https://datasheet.ciiva.com/11205/bc559-11205941.pdf?src-supplier=Avnet, ComponentLink3URL=https://datasheet.ciiva.com/11205/bc559-11205941.pdf?src-supplier=Avnet, ComponentLink4Description=https://datasheet.ciiva.com/971/bc556-971945.pdf?src-supplier=Digi-Key, ComponentLink4URL=https://datasheet.ciiva.com/971/bc556-971945.pdf?src-supplier=Digi-Key, ComponentLink5Description=https://datasheet.ciiva.com/6356/bc556-6356078.pdf?src-supplier=Digi-Key, ComponentLink5URL=https://datasheet.ciiva.com/6356/bc556-6356078.pdf?src-supplier=Digi-Key, ComponentLink6Description=https://datasheet.ciiva.com/46415/1817587-46415452.pdf?src-supplier=Element14, ComponentLink6URL=https://datasheet.ciiva.com/46415/1817587-46415452.pdf?src-supplier=Element14, Contact Plating=Tin,Matte, Element Configuration=Single, Gain Bandwidth Product=150MHz, Height=4.58mm, hFE Min=110, Lead Free="Lead Free", Length=4.58mm, Manufacturer Part Number=BC557BTA, Max Breakdown Voltage=45V, Max Frequency=150MHz, Mount="Through Hole", Number of Elements=1, Number of Pins=3, Packaging="Ammo Pack", Polarity=PNP, Power Dissipation=500mW, Pricing 1="1=0,36000, 10=0,29700, 100=0,15770, 500=0,10374, 1000=0,07055 (USD)", Radiation Hardening=No, REACH SVHC="No SVHC", RoHS=Yes, RoHS Compliant=Yes, Series=-, Stock 1=13151, Supplier 1=Digi-Key, Transition Frequency=150MHz, Weight=0.24g, Width=3.86mm
R1 R2 R5 R8 R9 R11 R12 R13: library part "0603_RES  R_100", "RES 100R %5 0603 SMD", Case Code (Metric)=1608, Case Code (Imperial)=0603, Manufacturer=Yageo, Max Operating Temperature=155°C, Max Power Dissipation=100mW, Min Operating Temperature=-55°C, Resistance=100R, Resistance Tolerance=5%, Resistor Type="Thick Film", Supplier Part Number 1=311-100GRCT-ND, Temperature Coefficient=100ppm/°C, Voltage Rating=50V, Case/Package=0603, Category="Chip SMD Resistors", ComponentLink1Description=https://datasheet.ciiva.com/7746/443971-7746425.pdf?src-supplier=Element14, ComponentLink1URL=https://datasheet.ciiva.com/7746/443971-7746425.pdf?src-supplier=Element14, ComponentLink2Description=https://datasheet.ciiva.com/7746/443971-7746426.pdf?src-supplier=Element14, ComponentLink2URL=https://datasheet.ciiva.com/7746/443971-7746426.pdf?src-supplier=Element14, ComponentLink3Description=https://datasheet.ciiva.com/8883/pyu-rc0603-51-rohs-l-4-8883047.pdf?src-supplier=Avnet, ComponentLink3URL=https://datasheet.ciiva.com/8883/pyu-rc0603-51-rohs-l-4-8883047.pdf?src-supplier=Avnet, ComponentLink4Description=https://datasheet.ciiva.com/15189/getdatasheetpartid-325207-15189846.pdf?src-supplier=Verical, ComponentLink4URL=https://datasheet.ciiva.com/15189/getdatasheetpartid-325207-15189846.pdf?src-supplier=Verical, Construction=Rectangular, Contact Plating=Tin,Matte, Depth=0.8mm, Features="Moisture Resistant", Lead Free="Lead Free", Length=1.6mm, Manufacturer Part Number=RC0603JR-07100RL, Military Standard=Not, Number of Pins=2, Number of Terminations=2, Packaging="Tape and Reel", Power Rating=100mW, Pricing 1="1=0,10000, 10=0,01900, 100=0,00770, 1000=0,00344, 2500=0,00298 (USD)", Radiation Hardening=No, REACH SVHC=Unknown, Resistor=100R, RoHS=Yes, RoHS Compliant=Yes, Series=RC, Size Code=0603, Stock 1=4159902, Supplier 1=Digi-Key, Termination=SMD/SMT, Tolerance=5%, Voltage Rating (DC)=50V, Width=0.8mm
R3 R4 R6 R7 R10 R14: library part "0603_RES  K_10", "RES 10K %1 0603 SMD", Case Code (Metric)=1608, Case Code (Imperial)=0603, Manufacturer=Yageo, Max Operating Temperature=155°C, Max Power Dissipation=100mW, Min Operating Temperature=-55°C, Resistance=10kR, Resistance Tolerance=1%, Resistor=10K, Resistor Type="Thick Film", Supplier Part Number 1=311-10.0KHRCT-ND, Temperature Coefficient=100ppm/°C, Voltage Rating=75V, Voltage Rating (DC)=50V, Case/Package=0603, Category="Chip SMD Resistors", ComponentLink1Description=https://datasheet.ciiva.com/7660/38590-7660789.pdf?src-supplier=Element14, ComponentLink1URL=https://datasheet.ciiva.com/7660/38590-7660789.pdf?src-supplier=Element14, ComponentLink2Description=https://datasheet.ciiva.com/7983/443971-7983596.pdf?src-supplier=Element14, ComponentLink2URL=https://datasheet.ciiva.com/7983/443971-7983596.pdf?src-supplier=Element14, ComponentLink3Description=https://datasheet.ciiva.com/22747/443971-22747519.pdf?src-supplier=Element14, ComponentLink3URL=https://datasheet.ciiva.com/22747/443971-22747519.pdf?src-supplier=Element14, ComponentLink4Description=https://datasheet.ciiva.com/46440/1868787-46440891.pdf?src-supplier=Element14, ComponentLink4URL=https://datasheet.ciiva.com/46440/1868787-46440891.pdf?src-supplier=Element14, ComponentLink5Description=https://datasheet.ciiva.com/7746/1738695-7746239.pdf?src-supplier=Element14, ComponentLink5URL=https://datasheet.ciiva.com/7746/1738695-7746239.pdf?src-supplier=Element14, ComponentLink6Description=https://datasheet.ciiva.com/15189/getdatasheetpartid-409289-15189591.pdf?src-supplier=Verical, ComponentLink6URL=https://datasheet.ciiva.com/15189/getdatasheetpartid-409289-15189591.pdf?src-supplier=Verical, Construction=Rectangular, Depth=0.8mm, Features="Moisture Resistant", Height=0.45mm, Lead Free="Lead Free", Lead Pitch=0.3mm, Length=1.6mm, Manufacturer Part Number=RC0603FR-0710KL, Military Standard=Not, Number of Pins=2, Number of Terminations=2, Packaging="Tape and Reel", Power Rating=100mW, Pricing 1="1=0,10000, 10=0,02300, 100=0,00930, 1000=0,00417, 2500=0,00362 (USD)", REACH SVHC=Unknown, RoHS=Yes, RoHS Compliant=Yes, Series=RC, Size Code=0603, Stock 1=47599943, Supplier 1=Digi-Key, Termination=SMD/SMT, Tolerance=1%, Weight=7.1E-05oz, Width=0.8mm
R15 R16 R17 R25 R26 R27: library part "0603_RES  K_1", "RES 1K %1 0603 SMD", Case Code (Metric)=1608, Case Code (Imperial)=0603, Manufacturer=Yageo, Max Operating Temperature=155°C, Max Power Dissipation=100mW, Min Operating Temperature=-55°C, Resistance=1kR, Resistance Tolerance=1%, Resistor=1K, Resistor Type="Thick Film", Supplier Part Number 1=311-1.00KHRCT-ND, Temperature Coefficient=100ppm/°C, Voltage Rating=50V, Case/Package=0603, Category="Chip SMD Resistors", Construction=Rectangular, Contact Plating=Tin,Matte, Depth=0.8mm, Features="Moisture Resistant", Height=0.45mm, Lead Free="Lead Free", Length=1.6mm, Manufacturer Part Number=RC0603FR-071KL, Military Standard=Not, Number of Terminations=2, Packaging="Tape and Reel", Power Rating=100mW, Pricing 1="1=0,10000, 10=0,02300, 100=0,00930, 1000=0,00417, 2500=0,00362 (USD)", Radiation Hardening=No, REACH SVHC="No SVHC", RoHS=Yes, RoHS Compliant=Yes, Series=RC, Size Code=0603, Stock 1=9003175, Supplier 1=Digi-Key, Technology="THICK FILM", Termination=SMD/SMT, Tolerance=1%
R18 R19 R20 R21 R22 R23 R24: library part "0603_RES  R_330", "RES 330R %5 0603 SMD", Case Code (Metric)=1608, Case Code (Imperial)=0603, Manufacturer=Yageo, Max Operating Temperature=155°C, Max Power Dissipation=100mW, Min Operating Temperature=-55°C, Package Quantity=5000, Resistance=330R, Resistance Tolerance=5%, Resistor Type="Thick Film", Supplier Part Number 1=311-330GRCT-ND, Temperature Coefficient=100ppm/°C, Voltage Rating=50V, Case/Package=0603, Category="Chip SMD Resistors", ComponentLink1Description=https://datasheet.ciiva.com/46395/443971-46395145.pdf?src-supplier=Element14, ComponentLink1URL=https://datasheet.ciiva.com/46395/443971-46395145.pdf?src-supplier=Element14, ComponentLink2Description=https://datasheet.ciiva.com/12558/rc0603-272842-12558685.pdf?src-supplier=Mouser, ComponentLink2URL=https://datasheet.ciiva.com/12558/rc0603-272842-12558685.pdf?src-supplier=Mouser, ComponentLink3Description=https://datasheet.ciiva.com/7746/1868787-7746487.pdf?src-supplier=Element14, ComponentLink3URL=https://datasheet.ciiva.com/7746/1868787-7746487.pdf?src-supplier=Element14, ComponentLink4Description=https://datasheet.ciiva.com/7746/443971-7746488.pdf?src-supplier=Element14, ComponentLink4URL=https://datasheet.ciiva.com/7746/443971-7746488.pdf?src-supplier=Element14, ComponentLink5Description=https://datasheet.ciiva.com/15189/getdatasheetpartid-342831-15189868.pdf?src-supplier=Verical, ComponentLink5URL=https://datasheet.ciiva.com/15189/getdatasheetpartid-342831-15189868.pdf?src-supplier=Verical, Construction=Rectangular, Depth=0.8mm, Features="Moisture Resistant", Height=0.45mm, Lead Free="Lead Free", Length=1.6mm, Manufacturer Part Number=RC0603JR-07330RL, Military Standard=Not, Number of Pins=2, Number of Terminations=2, Packaging="Tape and Reel", Power Rating=100mW, Pricing 1="1=0,10000, 10=0,01900, 100=0,00770, 1000=0,00344, 2500=0,00298 (USD)", REACH SVHC="No SVHC", Resistor=330R, RoHS=Yes, RoHS Compliant=Yes, Series=RC, Size Code=0603, Stock 1=4868904, Supplier 1=Digi-Key, Termination=SMD/SMT, Tolerance=5%, Voltage Rating (DC)=50V, Width=0.8mm
SR1: library part LM35DZ, "Temperature Sensor Analog, Local 0°C ~ 100°C 10mV/°C TO-92-3", Case/Package=TO-92, Manufacturer="TI National Semiconductor", Max Operating Temperature=110°C, Max Supply Voltage=30V, Min Operating Temperature=-40°C, Min Supply Voltage=4V, Operating Supply Current=91.5uA, Output Current=10mA, Package Quantity=1800, Quiescent Current=56uA, Supplier Part Number 1=LM35DZ/NOPB-ND, Category="Integrated Circuits (ICs)", ComponentLink1Description=https://datasheet.ciiva.com/19482/1276463-19482932.pdf?src-supplier=Jameco, ComponentLink1URL=https://datasheet.ciiva.com/19482/1276463-19482932.pdf?src-supplier=Jameco, ComponentLink2Description=https://datasheet.ciiva.com/1514/1896190-1514203.pdf?src-supplier=Element14, ComponentLink2URL=https://datasheet.ciiva.com/1514/1896190-1514203.pdf?src-supplier=Element14, ComponentLink3Description=https://datasheet.ciiva.com/6476/lm35-6476186.pdf?src-supplier=Digi-Key, ComponentLink3URL=https://datasheet.ciiva.com/6476/lm35-6476186.pdf?src-supplier=Digi-Key, Contact Plating=Tin, Height=5.2mm, Lead Free="Lead Free", Length=5.2mm, Manufacturer Part Number=LM35DZ/NOPB, Max Supply Voltage (DC)=30V, Min Supply Voltage (DC)=4V, Mount="Through Hole", Number of Pins=3, Output=ANALOG, Output Type="Voltage,Analog Voltage,Analog", Packaging=Bulk, Pricing 3="1800=1,30300 (GBP)", Radiation Hardening=No, REACH SVHC="No SVHC", RoHS=Yes, RoHS Compliant=Yes, Series=-, Stock 3=2, Supplier 1=Digi-Key, Supplier 2="Arrow Electronics", Supplier 3=RSComponents, Supplier Part Number 2=LM35DZ/NOPB, Supplier Part Number 3=1977271, Weight=0.01lb, Width=4.19mm, Interface=Analog
SW1 SW2 SW3 SW4 SW5: library part BUTTON_SMD, "Tactile Switch SPST-NO Top Actuated Surface Mount", Manufacturer="ITT C&K", Manufacturer Part Number=PTS526SMG15SMTR2LFS, Supplier Part Number 1=CKN12222-1-ND, Category="Tactile Switches", Pricing 2="1=0,19000, 10=0,18600, 25=0,17640, 100=0,16050, 250=0,15088, 500=0,13804, 1000=0,11556 (USD)", RoHS=No, Stock 2=51840, Supplier 1=Digi-Key, Supplier 2=Digi-Key, Supplier Part Number 2=CKN12224-1-ND
U1: library part 7805, "Linear Voltage Regulator IC Positive Fixed 1 Output 5V 1.5A D2PAK", Case/Package=TO-263, Dropout Voltage=2V, Manufacturer=STMicroelectronics, Max Operating Temperature=150°C, Max Output Current=1.5A, Max Input Voltage=35V, Min Operating Temperature=0°C, Min Output Voltage=5V, Min Input Voltage=7V, Output Voltage Accuracy=2%, Package Quantity=1000, Power Supply Rejection Ratio (PSRR)=68dB, Quiescent Current=6mA, Supplier Part Number 1=497-7253-1-ND, Accuracy=2%, Category="Voltage Regulators - Linear", ComponentLink1Description=https://datasheet.ciiva.com/15111/getdatasheetpartid-69832-15111359.pdf?src-supplier=Verical, ComponentLink1URL=https://datasheet.ciiva.com/15111/getdatasheetpartid-69832-15111359.pdf?src-supplier=Verical, ComponentLink2Description=https://datasheet.ciiva.com/1511/1805459-1511908.pdf?src-supplier=Element14, ComponentLink2URL=https://datasheet.ciiva.com/1511/1805459-1511908.pdf?src-supplier=Element14, ComponentLink3Description=https://datasheet.ciiva.com/2042/cd00000444-2042978.pdf?src-supplier=Digi-Key, ComponentLink3URL=https://datasheet.ciiva.com/2042/cd00000444-2042978.pdf?src-supplier=Digi-Key, ComponentLink4Description=https://datasheet.ciiva.com/2042/cd00000444-2042977.pdf?src-supplier=Digi-Key, ComponentLink4URL=https://datasheet.ciiva.com/2042/cd00000444-2042977.pdf?src-supplier=Digi-Key, ComponentLink5Description=https://datasheet.ciiva.com/2042/cd00000444-2042979.pdf?src-supplier=Digi-Key, ComponentLink5URL=https://datasheet.ciiva.com/2042/cd00000444-2042979.pdf?src-supplier=Digi-Key, ComponentLink6Description=https://datasheet.ciiva.com/16353/cd00000444-16353997.pdf?src-supplier=Future+Electronics, ComponentLink6URL=https://datasheet.ciiva.com/16353/cd00000444-16353997.pdf?src-supplier=Future+Electronics, Contact Plating=Tin,Matte, Height=4.6mm, Lead Free="Lead Free", Length=10.4mm, Manufacturer Part Number=L7805ACD2T-TR, Mount="Surface Mount", Nominal Output Voltage=5V, Number of Outputs=1, Number of Pins=3, Number of Regulators=1, Output Current=1.5A, Output Type=Fixed, Output Voltage=5V, Packaging="Cut Tape", Polarity=Positive, Pricing 1="1=1,08000, 10=0,97000, 25=0,92040, 100=0,75600, 250=0,70672, 500=0,62454 (USD)", Radiation Hardening=No, REACH SVHC="No SVHC", RoHS=Yes, RoHS Compliant=Yes, Series=L78, Stock 1=2000, Supplier 1=Digi-Key, Weight=7.1E-05oz, Width=9.35mm
U2: "AP7361 Series 3.3 V 1 A Low SMT Dropout Fixed-Mode Regulator - SOT-223"
U3: library part DS1302_SMD, "IC RTC CLK/CALENDAR SER 8-SOIC", Case/Package=SOIC, Manufacturer=Maxim, Manufacturer Part Number=DS1302Z/T&R, Max Operating Temperature=70°C, Min Operating Temperature=0°C, Supplier Part Number 1=DS1302Z/T&R-ND, Category="Real Time Clocks", ComponentLink1Description=https://datasheet.ciiva.com/1243/ds1302-1243262.pdf?src-supplier=Digi-Key, ComponentLink1URL=https://datasheet.ciiva.com/1243/ds1302-1243262.pdf?src-supplier=Digi-Key, Lead Free="Contains Lead", Memory Size=31B, Number of Pins=8, RoHS=No, RoHS Compliant=No, Supplier 1=Digi-Key, Time Format="HH:MM:SS (12/24 hr)"
U4: library part PIC16F877/A_SMD, "PIC16F Series 14 kB Flash 368 B RAM 20 MHz 8-Bit Microcontroller - TQFP-44", Case/Package=TQFP, Frequency=20MHz, Manufacturer=Microchip, Max Operating Temperature=70°C, Max Power Dissipation=1W, Max Supply Voltage=5.5V, Min Operating Temperature=0°C, Min Supply Voltage=4V, Operating Supply Voltage=5V, Package Quantity=160, Supplier Part Number 1=PIC16F877-20/PT-ND, Access Time=20us, Category=Microcontrollers, ComponentLink1Description=https://datasheet.ciiva.com/4839/30292c-55665-4839243.pdf?src-supplier=Mouser, ComponentLink1URL=https://datasheet.ciiva.com/4839/30292c-55665-4839243.pdf?src-supplier=Mouser, ComponentLink2Description=https://datasheet.ciiva.com/14561/70045624-14561738.pdf?src-supplier=Allied+Electronics, ComponentLink2URL=https://datasheet.ciiva.com/14561/70045624-14561738.pdf?src-supplier=Allied+Electronics, ComponentLink3Description=https://datasheet.ciiva.com/7774/30292c-7774269.pdf?src-supplier=Element14, ComponentLink3URL=https://datasheet.ciiva.com/7774/30292c-7774269.pdf?src-supplier=Element14, ComponentLink4Description=https://datasheet.ciiva.com/3203/30292c-3203495.pdf?src-supplier=Avnet, ComponentLink4URL=https://datasheet.ciiva.com/3203/30292c-3203495.pdf?src-supplier=Avnet, ComponentLink5Description=https://datasheet.ciiva.com/16371/filehandler-aspxddocname-en011185-16371133.pdf?src-supplier=Future+Electronics, ComponentLink5URL=https://datasheet.ciiva.com/16371/filehandler-aspxddocname-en011185-16371133.pdf?src-supplier=Future+Electronics, ComponentLink6Description=https://datasheet.ciiva.com/15199/getdatasheetpartid-423006-15199867.pdf?src-supplier=Verical, ComponentLink6URL=https://datasheet.ciiva.com/15199/getdatasheetpartid-423006-15199867.pdf?src-supplier=Verical, ComponentLink7Description=https://datasheet.ciiva.com/1496/30292c-1496841.pdf?src-supplier=Digi-Key, ComponentLink7URL=https://datasheet.ciiva.com/1496/30292c-1496841.pdf?src-supplier=Digi-Key, Contact Plating=Tin,Matte, Core Architecture=PIC, Data Bus Width=8b, Height=0.041inch, Lead Free="Lead Free", Lead Pitch=0.5mm, Length=0.397inch, Manufacturer Part Number=PIC16F877-20/PT, Max Frequency=20MHz, Memory Size=14KB, Memory Type=FLASH, Number of A/D Converters=1, Number of ADC Channels=8, Number of Bits=8, Number of Pins=44, Number of Programmable I/O=33, Number of PWM Channels=2, Number of SPI Channels=1, Number of Timers/Counters=3, Number of UART Channels=1, Number of USB Channels=0, Number of I2C Channels=1, Number of I/Os=33, Oscillator Type=External, Packaging=Tray, Peripherals="PWM,I2C,Brown-out Detect/Reset,POR,WDT", Radiation Hardening=No, RAM Size=368B, REACH SVHC="No SVHC", RoHS=Yes, RoHS Compliant=Yes, Supplier 1=Digi-Key, Termination=SMD/SMT, Watchdog Timer=Yes, Width=0.398inch, Interface=I2C,SPI,UART,USART,SSP
XTAL1: library part "CRYSTAL_32.768 KHZ_SMD", "ABRACON - ABS05-32.768KHZ-T - Crystal, 32.768 kHz, SMD, 1.6mm x 1mm, 12.5 pF, 20 ppm, ABS05 Series", Case/Package=SMD/SMT, ESR (Equivalent Series Resistance)=90kR, Frequency=32.768kHz, Frequency Tolerance=20ppm, Load Capacitance=12.5pF, Manufacturer=Abracon, Max Operating Temperature=85°C, Min Operating Temperature=-40°C, Operating Frequency="32.768 kHz", Package Quantity=3000, Supplier Part Number 1=535-11899-1-ND, Category=Crystals, ComponentLink1Description=https://datasheet.ciiva.com/23810/abs05-23810480.pdf?src-supplier=Newark, ComponentLink1URL=https://datasheet.ciiva.com/23810/abs05-23810480.pdf?src-supplier=Newark, ComponentLink2Description=https://datasheet.ciiva.com/6728/abs05-6728949.pdf?src-supplier=Digi-Key, ComponentLink2URL=https://datasheet.ciiva.com/6728/abs05-6728949.pdf?src-supplier=Digi-Key, ComponentLink3Description=https://datasheet.ciiva.com/6728/abs05-6728950.pdf?src-supplier=Digi-Key, ComponentLink3URL=https://datasheet.ciiva.com/6728/abs05-6728950.pdf?src-supplier=Digi-Key, ComponentLink4Description=https://datasheet.ciiva.com/16411/abs05-16411149.pdf?src-supplier=Future+Electronics, ComponentLink4URL=https://datasheet.ciiva.com/16411/abs05-16411149.pdf?src-supplier=Future+Electronics, Crystal=32.768KHZ, Depth=1mm, Height=0.02inch, Lead Free="Lead Free", Length=1.6mm, Manufacturer Part Number=ABS05-32.768KHZ-T, Mount="Surface Mount", Number of Pins=2, Packaging="Tape and Reel", Pricing 1="1=1,47000, 10=1,40400, 50=1,37080, 100=1,17500, 500=1,14240, 1000=0,96288 (USD)", Radiation Hardening=No, REACH SVHC="No SVHC", RoHS=Yes, RoHS Compliant=Yes, Series=ABS05, Series Resistance=90kR, Stock 1=434040, Supplier 1=Digi-Key, Termination=SMD/SMT, Tolerance=20ppm, Width=0.039inch
XTAL2: library part "CRYSTAL_20 MHZ_20PF_2 SMD", "20 MHz ±30ppm Crystal 20pF 30 Ohms 2-SMD, No Lead", Case/Package=SMD/SMT, ESR (Equivalent Series Resistance)=30R, Frequency=20MHz, Frequency Stability=50ppm, Frequency Tolerance=30ppm, Load Capacitance=20pF, Manufacturer="ECS International", Max Operating Temperature=85°C, Min Operating Temperature=-40°C, Package Quantity=1, Supplier Part Number 1=XC988CT-ND, Category=Crystals, ComponentLink1Description=https://datasheet.ciiva.com/859/ecx-64aen-ecx-64cen-859395.pdf?src-supplier=Digi-Key, ComponentLink1URL=https://datasheet.ciiva.com/859/ecx-64aen-ecx-64cen-859395.pdf?src-supplier=Digi-Key, ComponentLink2Description=https://datasheet.ciiva.com/859/ecx-64aen-ecx-64cen-859396.pdf?src-supplier=Digi-Key, ComponentLink2URL=https://datasheet.ciiva.com/859/ecx-64aen-ecx-64cen-859396.pdf?src-supplier=Digi-Key, ComponentLink3Description=https://datasheet.ciiva.com/859/ecx-64aen-ecx-64cen-859397.pdf?src-supplier=Digi-Key, ComponentLink3URL=https://datasheet.ciiva.com/859/ecx-64aen-ecx-64cen-859397.pdf?src-supplier=Digi-Key, Crystal=20MHZ, Height=0.043inch, Lead Free="Lead Free", Length=0.236inch, Manufacturer Part Number=ECS-200-20-23A-EN-TR, Mount="Surface Mount", Packaging="Tape and Reel", Pricing 1="1=1,14000, 10=1,08600, 50=1,06040, 100=0,90900, 500=0,88376 (USD)", RoHS=Yes, Stock 1=8445, Supplier 1=Digi-Key, Termination=SMD/SMT, Width=0.138inch

## Via types
v1: diameter 0.5, hole 0.25, Top Layer to Bottom Layer, 110 vias
v2: diameter 1.5, hole 1, Top Layer to Bottom Layer, 4 vias

## Nets (pads, with @x,y where several pads share a name; then routed paths per layer and width w, separated by ;. In a path a pad name is that pad's centre, name@x,y a point inside that pad or via, vN(x,y) a via of type N, cw(c..) or ccw(c..) an arc to the next point about the centre after c; other vN are vias at no path point)
3V: C4.2 U2.3 U3.8 | length 55.9